# Altium PCB Car2014_finalRev.PcbDoc (part 1 of 2)
Units mm, origin at the board's own origin, x right, y up, seen from the top; angles counter-clockwise.
Board outline 109.6 x 77.2 mm, 4 copper layers (Top Layer, Mid-Layer 1, Mid-Layer 2, Bottom Layer); 157 components, 134 nets, 684 pads, 193 vias.
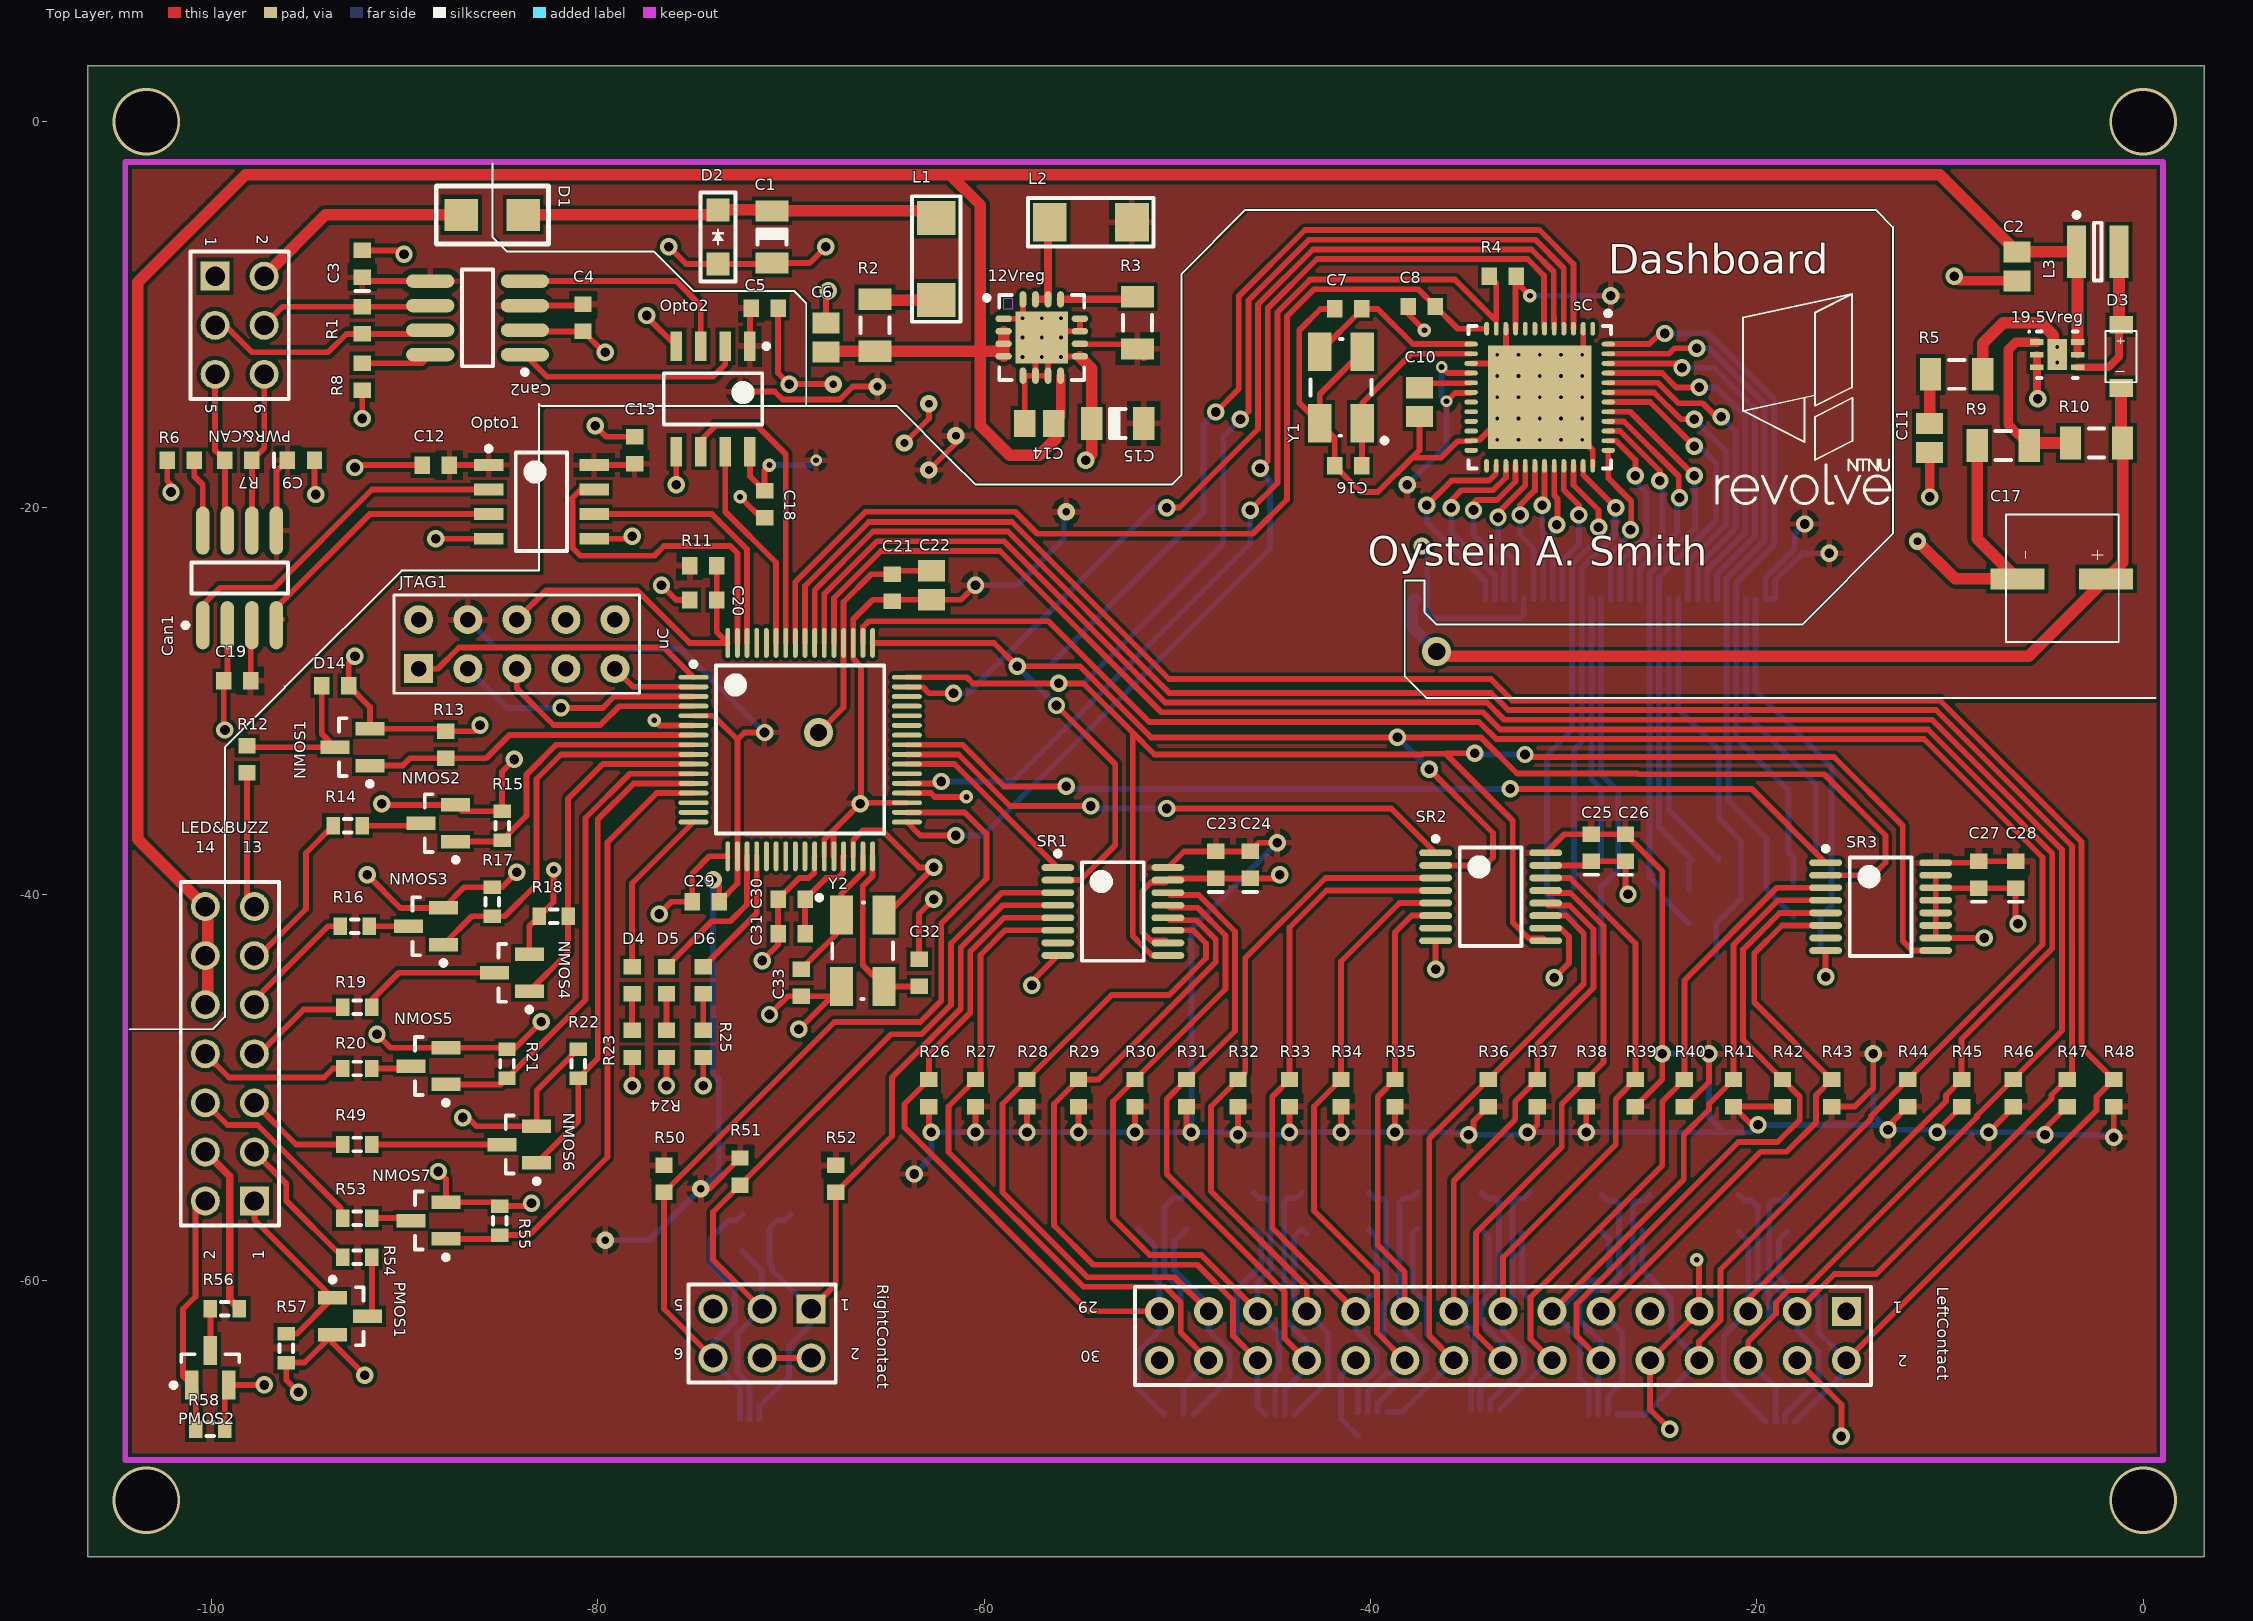
[diagram p0: Top Layer view]
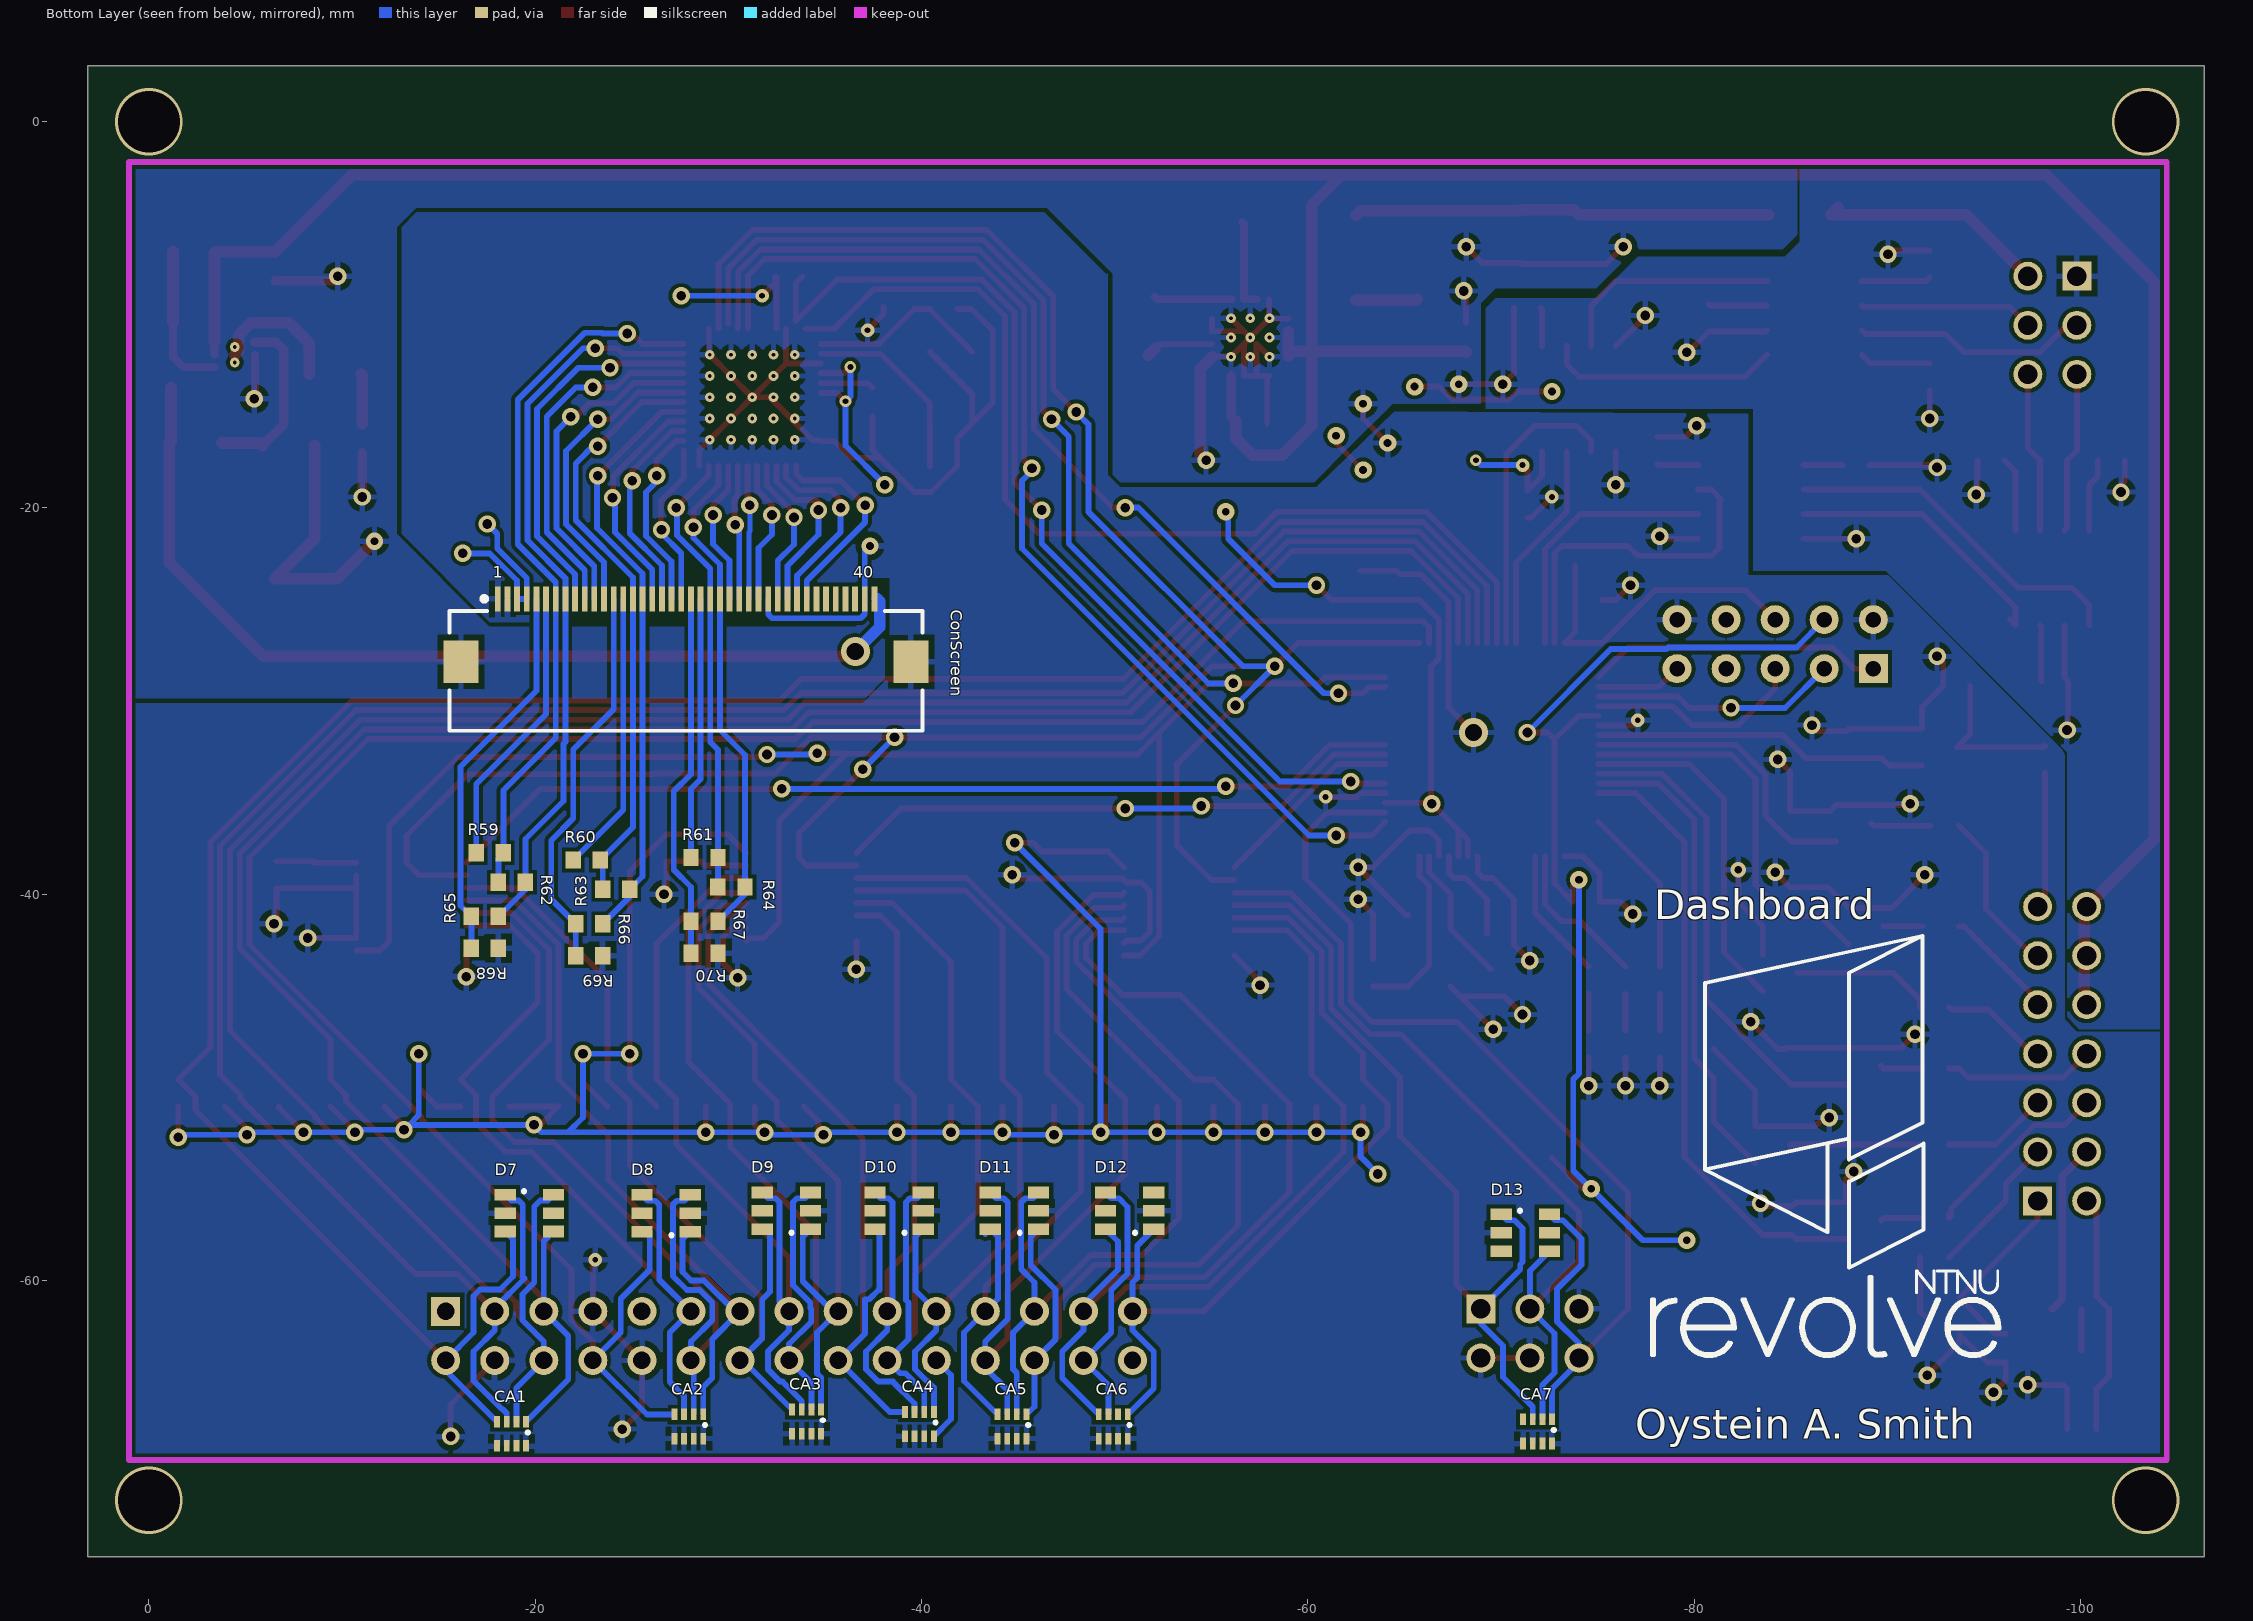
[diagram p1: Bottom Layer view, seen from below]
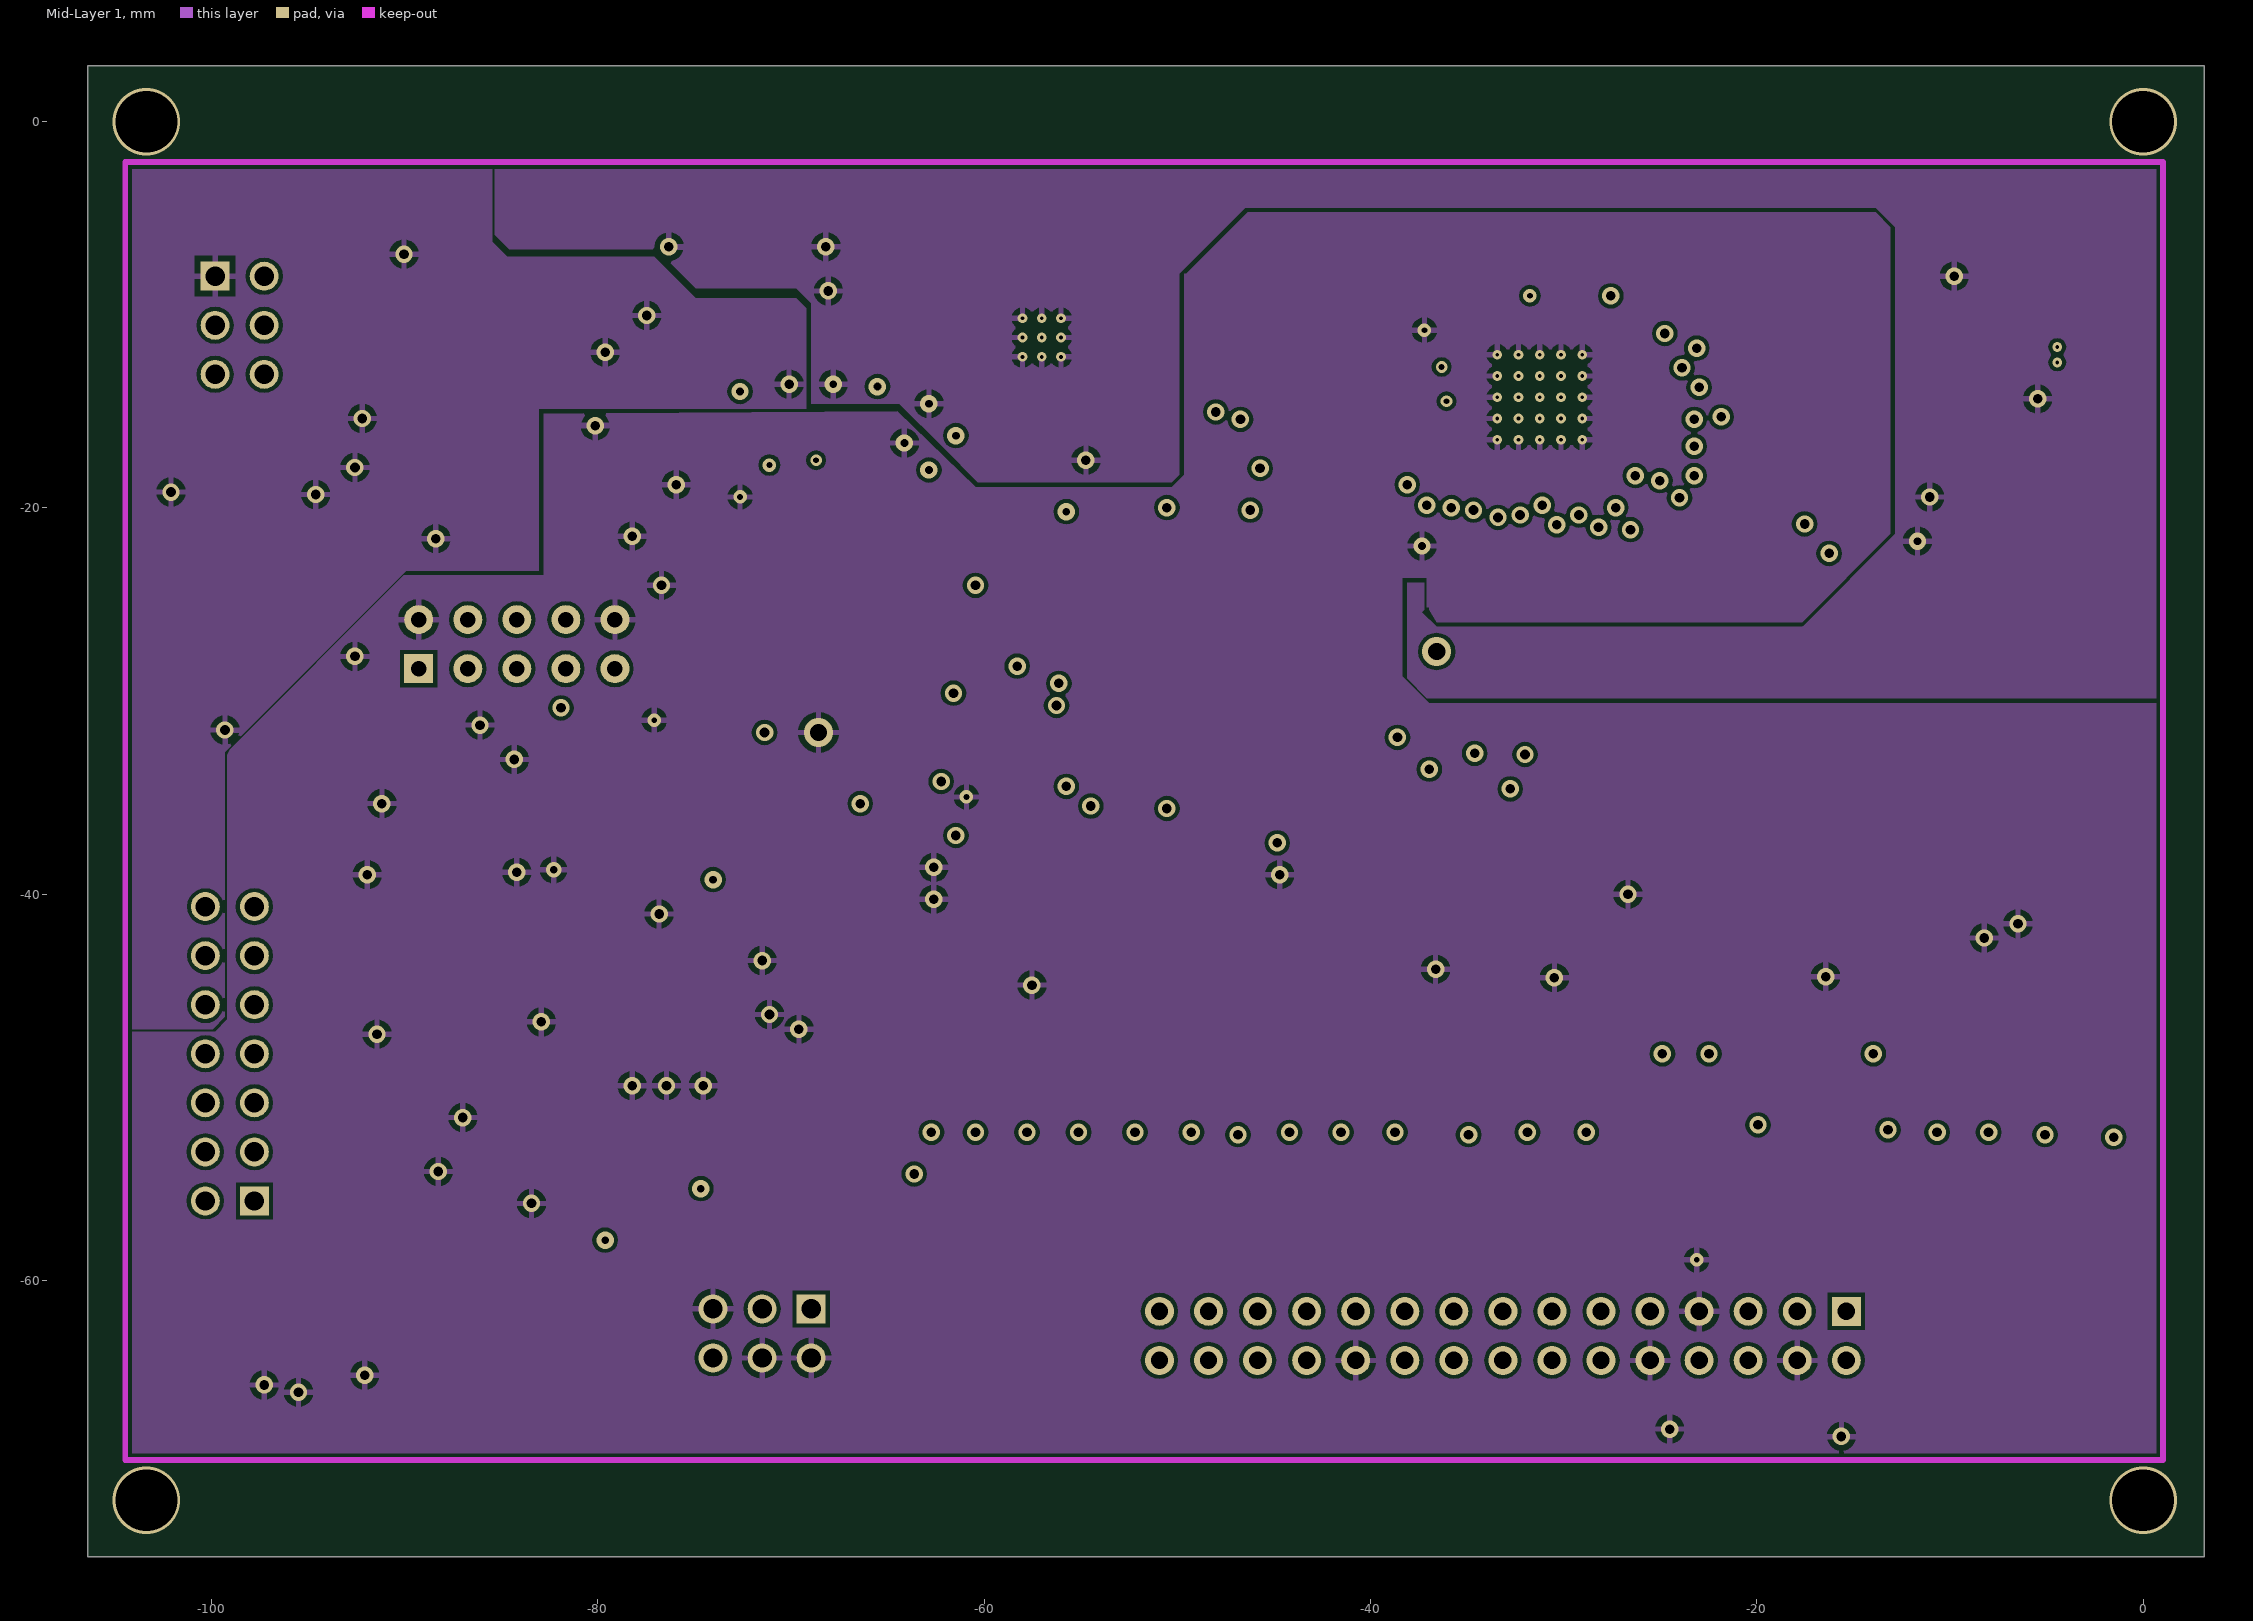
[diagram p2: Mid-Layer 1]
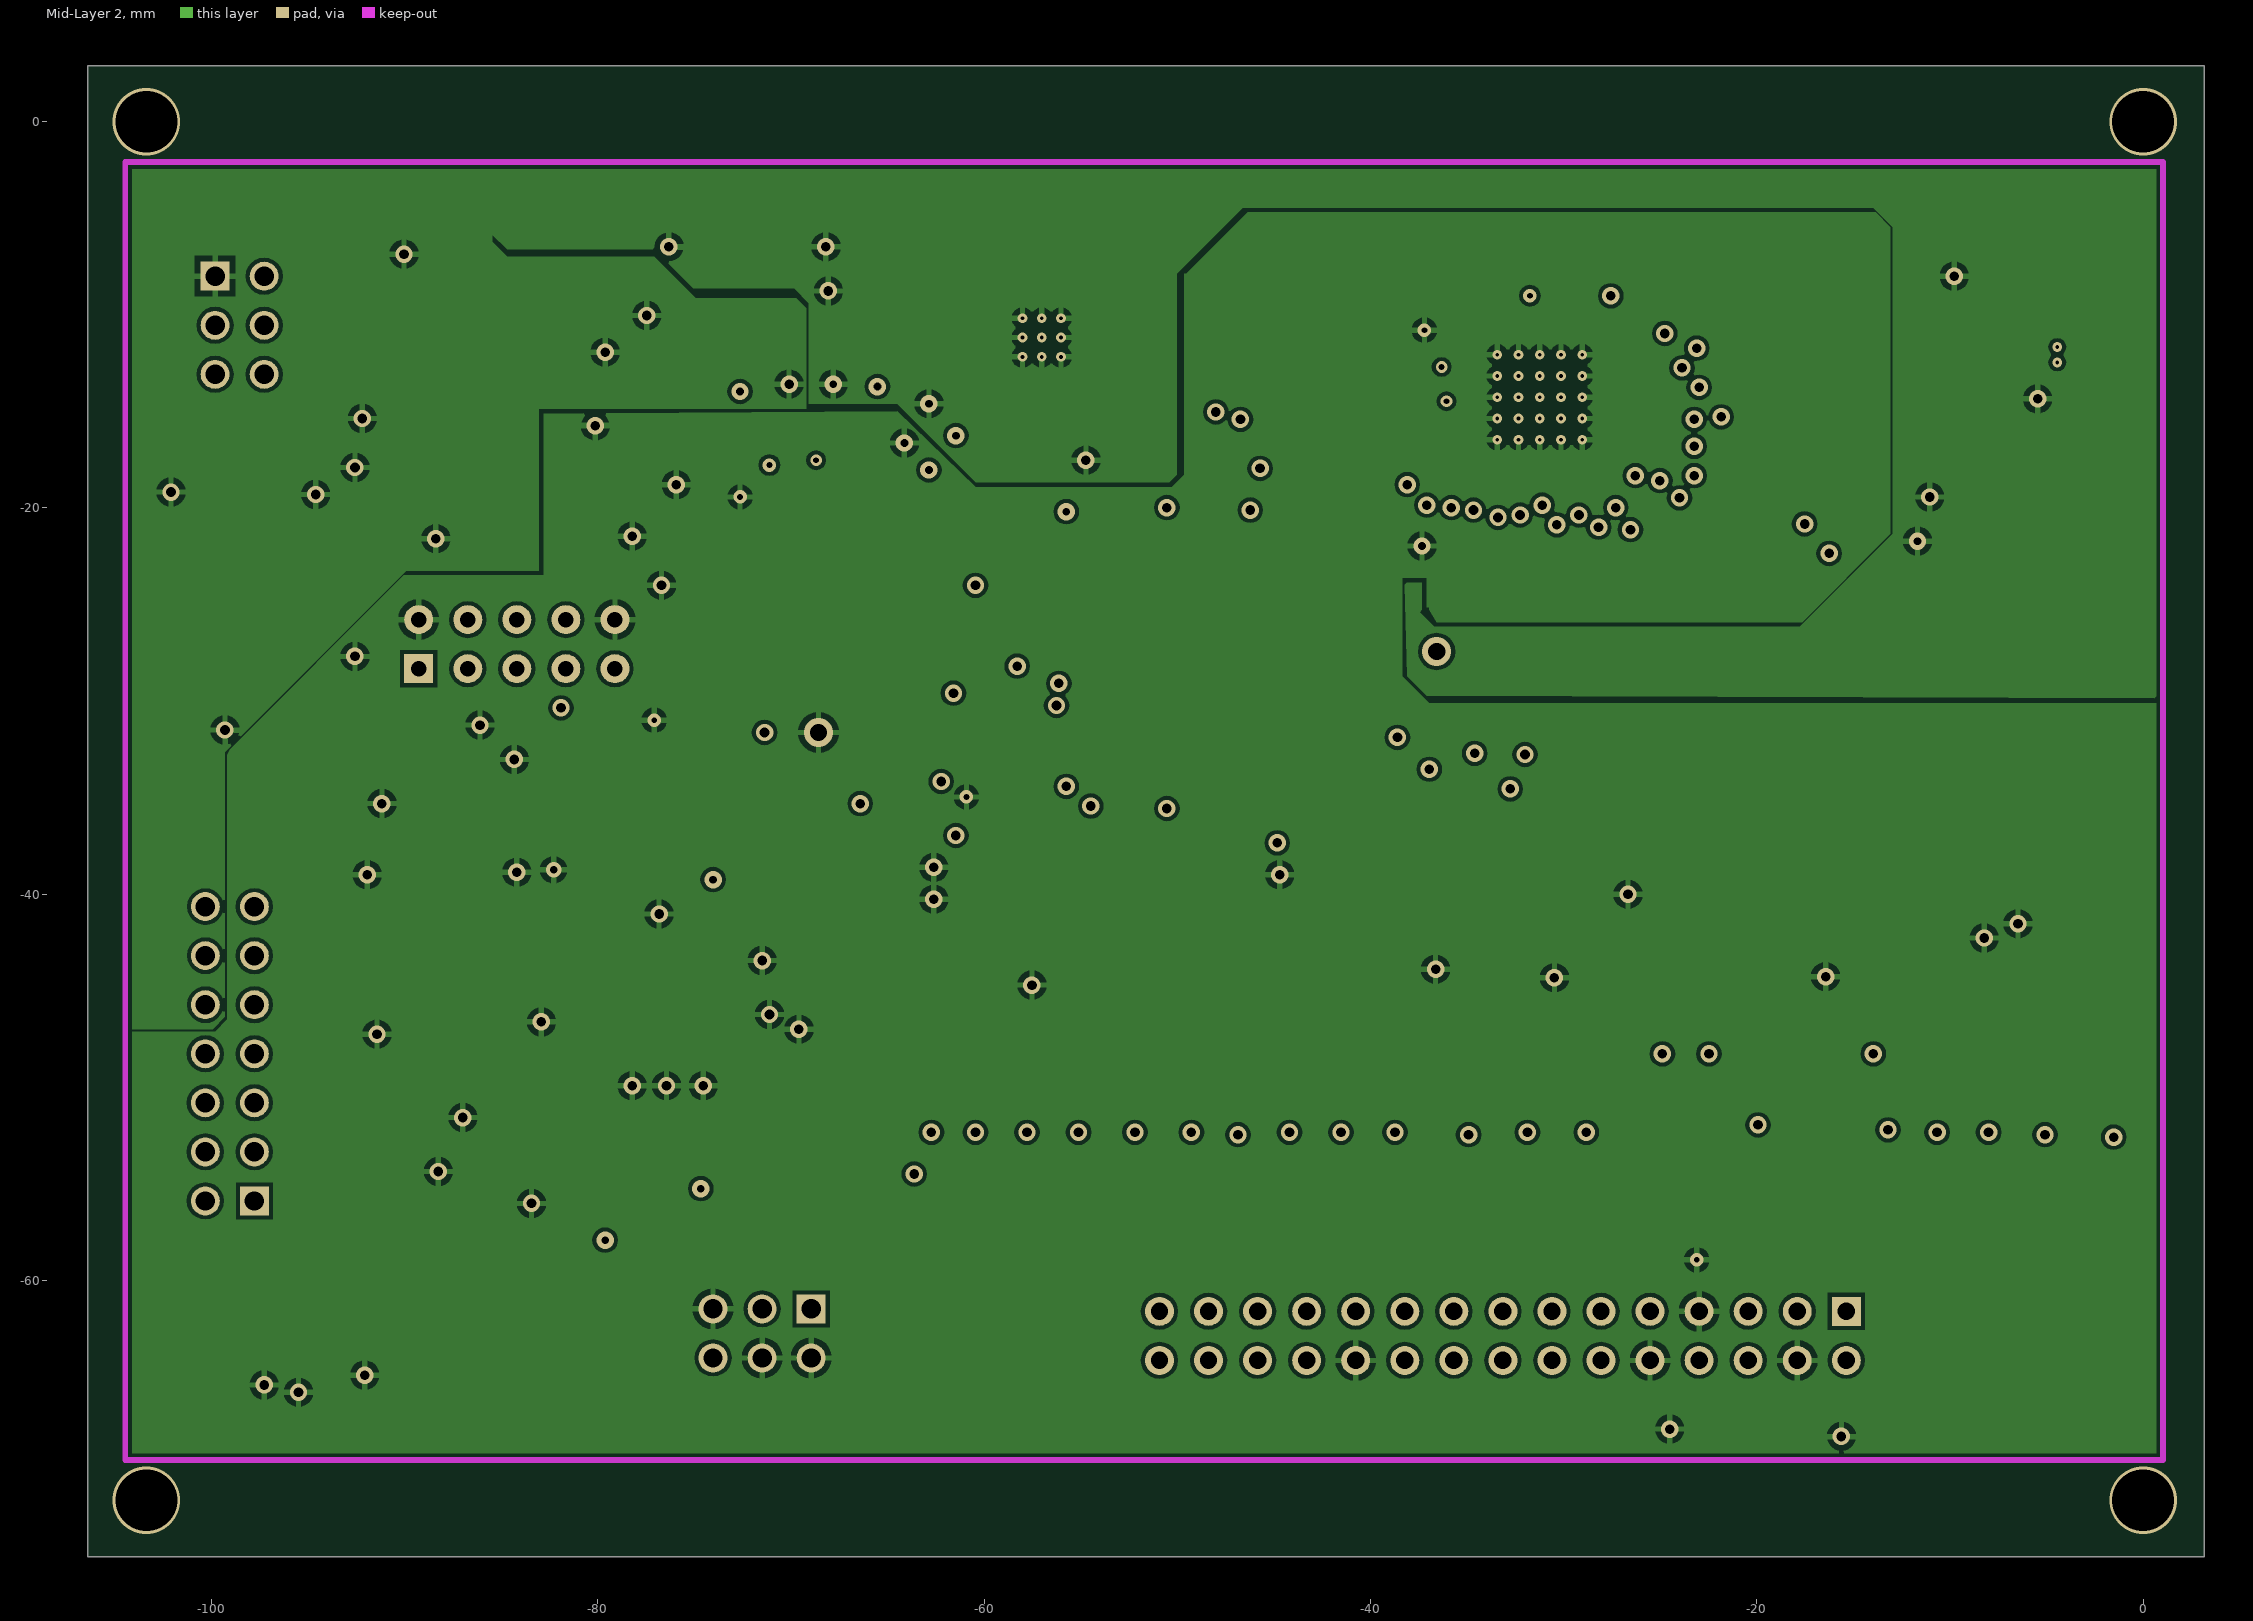
[diagram p3: Mid-Layer 2]

## Layer stack, top to bottom
Top Layer: signal copper 0.0356
Dielectric: core 0.32, FR-4, Dk 4.8
Mid-Layer 1: signal copper 0.0356
Dielectric: prepreg 0.32, FR-4, Dk 4.8
Mid-Layer 2: signal copper 0.0356
Dielectric: core 0.32, FR-4, Dk 4.8
Bottom Layer: signal copper 0.0356

## Board outline
-106.426,-74.295 3.175,-74.295 3.175,2.905 -106.426,2.905

## Design rules (kind name [scope] priority, off if disabled: settings)
AssemblyTestPointUsage SilkToBoardRegionClearance [All] p2:
Clearance [All] p1: gap=0.2
ComponentClearance [All] p1: gap=0.3 collisioncheckmode=3 verticalgap=0.3 showdistances=FALSE
HoleSize [All] p1: absolutevalues=TRUE maxlimit=3 minlimit=0.2 maxpercent=80.000 minpercent=20.000
MinimumAnnularRing [All] p1: minimumring=0.15
MinimumSolderMaskSliver [All] p1: minsoldermaskwidth=0.25
PlaneClearance [All] p1: clearance=0.5
PlaneConnect [All] p1: planeconnectstyle=Relief reliefexpansion=0.5 reliefentries=4 reliefconductorwidth=0.3 reliefairgap=0.3
PolygonConnect [All] p1: connectstyle=Relief reliefconductorwidth=0.3 reliefentries=4 polygonreliefangle="90 Angle" airgapwidth=0.3
RoutingVias [All] p1: holewidth=0.3 width=0.7 viastyle="Through Hole" minholewidth=0.2 minwidth=0.6 maxholewidth=0.9 maxwidth=1.5
SilkToSilkClearance [All] p1: silktosilkclearance=0.25
SilkToSolderMaskClearance [IsPad] p1: minsilkscreentomaskgap=0.25 clearancetoexposedcopper=TRUE
SolderMaskExpansion [All] p1: expansion=0.102
Width [All] p1: maxlimit=10 minlimit=0.15 preferedwidth=0.3
21 further rules are at their usual default settings.

## Classes and differential pairs
component class "Car2014_finalRev_sch2 (2)": C7 C23 C24 C25 C26 C27 C28 CA1 CA2 CA3 CA4 CA5 CA6 CA7 ConScreen D7 D8 D9 D10 D11 D12 D13 D14 JTAG1 LED&BUZZ NMOS1 NMOS2 NMOS3 NMOS4 NMOS5 NMOS6 NMOS7 PMOS1 PMOS2 R4 R12 R13 R14 R15 R16 R17 R18 R19 R20 R26 R27 R28 R29 R30 R31 R32 R33 R34 R36 R37 R38 R39 R40 R41 R42 R43 R44 R45 R46 R47 R48 R49 R50 R51 R52 R53 R54 R55 R56 R57 R58 R59 R60 R61 R62 R63 R64 R65 R66 R67 R68 R69 R70 RightContact sC SR1 SR2 SR3
component class Car2014_finalRev_sch1: 12Vreg 19.5Vreg C1 C2 C3 C9 C11 C12 C13 C14 C15 C17 C18 C19 C20 C21 C22 C29 C30 C31 C32 C33 Can1 Can2 D1 D2 D3 D4 D5 D6 L1 L2 L3 Opto1 Opto2 PWR&CAN R23 R24 R25 uC Y2

## Components (designator, comment, footprint, x,y, rotation, side; value= is the part's Value field where it differs from the comment)
12Vreg "TPS62111RSATG4" RSA16-2700X2700TP -57.023,-11.176 r0 top
19.5Vreg "TPS61170-Q1" DRV6-1600X1000TP -4.445,-12.065 r0 top
C1 "Cap" CAPC3216L -70.993,-5.969 r270 top (schematic designator C26)
C2 "Cap_Murata4,7uF" c0805 -6.539,-7.493 r90 top (schematic designator C36)
C3 "Cap" CAPC1608L -92.202,-7.366 r90 top (schematic designator C28)
C4 "Cap" 1608[0603] -80.772,-10.16 r270 top (schematic designator C3)
C5 "Cap" 1608[0603] -71.374,-9.652 r180 top (schematic designator C22)
C6 "Cap" c0805 -68.199,-11.176 r270 top (schematic designator C15)
C7 "Cap" 1608[0603] -41.148,-9.695 r0 top (schematic designator C4)
C8 "Cap" 1608[0603] -37.338,-9.568 r0 top (schematic designator C6)
C9 "Cap" CAPC1608L -95.377,-17.526 r0 top (schematic designator C29)
C10 "Cap" c0805 -37.465,-14.521 r90 top (schematic designator C7)
C11 "Cap" c0805 -11.049,-16.383 r90 top (schematic designator C37)
C12 "Cap" 1608[0603] -88.392,-17.78 r0 top (schematic designator C23)
C13 "Cap" 1608[0603] -78.105,-17.018 r270 top (schematic designator C25)
C14 "Cap" c0805 -57.15,-15.621 r0 top (schematic designator C1)
C15 "Cap" CAPC3216L -53.086,-15.621 r0 top (schematic designator C16)
C16 "Cap" 1608[0603] -41.148,-17.823 r0 top (schematic designator C5)
C17 "Cap Pol" CAP_electrolyte -2.413,-23.622 r90 top (schematic designator C38)
C18 "Cap" 1608[0603] -71.374,-19.812 r90 top (schematic designator C24)
C19 "Cap" 1608[0603] -98.679,-28.956 r0 top (schematic designator C17)
C20 "Cap" 1608[0603] -74.549,-24.765 r0 top (schematic designator C27)
C21 "Cap" 1608[0603] -64.77,-24.13 r270 top (schematic designator C10)
C22 "Cap" c0805 -62.738,-24.003 r270 top (schematic designator C12)
C23 "Cap" CAPC1608L -48.006,-38.481 r90 top (schematic designator C31)
C24 "Cap" CAPC1608L -46.228,-38.481 r90 top (schematic designator C30)
C25 "Cap" CAPC1608L -28.575,-37.592 r90 top (schematic designator C32)
C26 "Cap" CAPC1608L -26.797,-37.592 r90 top (schematic designator C33)
C27 "Cap" CAPC1608L -8.509,-38.989 r90 top (schematic designator C34)
C28 "Cap" CAPC1608L -6.604,-38.989 r90 top (schematic designator C35)
C29 "Cap" 1608[0603] -74.422,-40.386 r180 top (schematic designator C14)
C30 "Cap" 1608[0603] -69.977,-40.259 r180 top (schematic designator C11)
C31 "Cap" 1608[0603] -69.977,-42.037 r180 top (schematic designator C13)
C32 "Cap" 1608[0603] -63.373,-44.069 r270 top (schematic designator C8)
C33 "Cap" 1608[0603] -69.469,-44.577 r90 top (schematic designator C9)
CA1 "Cap_array" Cap_array_0805 -18.254,-67.564 r0 bottom (schematic designator CA7)
CA2 "Cap_array" Cap_array_0805 -27.432,-67.183 r0 bottom (schematic designator CA1)
CA3 "Cap_array" Cap_array_0805 -33.528,-66.929 r0 bottom (schematic designator CA2)
CA4 "Cap_array" Cap_array_0805 -39.37,-67.056 r0 bottom (schematic designator CA3)
CA5 "Cap_array" Cap_array_0805 -44.162,-67.183 r0 bottom (schematic designator CA4)
CA6 "Cap_array" Cap_array_0805 -49.403,-67.183 r0 bottom (schematic designator CA5)
CA7 "Cap_array" Cap_array_0805 -71.374,-67.437 r0 bottom (schematic designator CA6)
Can1 "SN65HVD234D" D8_M -98.552,-23.622 r90 top
Can2 "SN65HVD234D" D8_M -86.233,-10.16 r180 top
ConScreen "CL586-0557-8" FH12A-40S-0.5SH -27.813,-26.332 r180 bottom
D1 "STTH2R02" STTH2R02A -85.471,-4.826 r0 top (schematic designator D7)
D2 "TVS-diode_14V" TVS-DIODE_14V -73.787,-5.969 r90 top (schematic designator D20)
D3 "Schotky_MBR0530" SOD-123 -1.143,-10.541 r270 top (schematic designator D16)
D4 "LED" 1608[0603] -78.232,-44.45 r270 top (schematic designator D1)
D5 "LED" 1608[0603] -76.454,-44.45 r270 top (schematic designator D2)
D6 "LED" 1608[0603] -74.549,-44.45 r270 top (schematic designator D3)
D7 "TVS_array" TVS_array_SOT23 -17.653,-57.912 r270 bottom (schematic designator D12)
D8 "TVS_array" TVS_array_SOT23 -28.829,-55.118 r90 bottom
D9 "TVS_array" TVS_array_SOT23 -35.052,-54.991 r90 bottom
D10 "TVS_array" TVS_array_SOT23 -40.894,-54.991 r90 bottom
D11 "TVS_array" TVS_array_SOT23 -46.863,-54.991 r90 bottom
D12 "TVS_array" TVS_array_SOT23 -52.832,-54.991 r90 bottom (schematic designator D13)
D13 "TVS_array" TVS_array_SOT23 -69.215,-58.928 r270 bottom (schematic designator D14)
D14 "Schottky diode" 1608[0603] -93.599,-29.21 r0 top (schematic designator D15)
Dashboard "Dashboard" "REVOLVE LOGO SMALL" -17.393,-16.891 r0 top
Dashboard "Dashboard" "Revolve logo" -86.487,-58.039 r180 bottom
JTAG1 "Header 10-pin JTAG" "10pin Header" -89.281,-28.321 r90 top
L1 "Inductor - SPM6530-2R2M" Drossel -62.484,-7.112 r270 top (schematic designator L2)
L2 "Inductor - SPM6530-2R2M" Drossel -54.483,-5.207 r0 top (schematic designator L1)
L3 "SRN3015-220M" BOUR-SRN3015-2_V -2.348,-6.731 r0 top
LED&BUZZ "Molex WM8251" HDR2X7 -97.79,-55.88 r90 top
LeftContact "Header 15X2" HDR2X15 -15.367,-61.595 r180 top (schematic designator ConLft)
NMOS1 "SSM3K329RLFCT" SOT23 -92.71,-32.385 r180 top (schematic designator NMOS2)
NMOS2 "SSM3K329RLFCT" SOT23 -88.265,-36.322 r180 top (schematic designator NMOS8)
NMOS3 "SSM3K329RLFCT" SOT23 -88.9,-41.656 r180 top (schematic designator NMOS5)
NMOS4 "SSM3K329RLFCT" SOT23 -84.455,-44.069 r180 top (schematic designator NMOS7)
NMOS5 "SSM3K329RLFCT" SOT23 -88.773,-48.895 r180 top (schematic designator NMOS4)
NMOS6 "SSM3K329RLFCT" SOT23 -84.074,-52.959 r180 top
NMOS7 "SSM3K329RLFCT" SOT23 -88.773,-56.896 r180 top (schematic designator NMOS3)
Opto1 "CAN OptoCoupler" "SOIC 8pin,  optocoupler" -82.931,-19.685 r0 top
Opto2 "CAN OptoCoupler" "SOIC 8pin,  optocoupler" -74.041,-14.351 r270 top
PMOS1 "ZXMP2120" SOT23 -92.837,-61.849 r0 top
PMOS2 "ZXMP2120" SOT23 -100.076,-64.516 r90 top
PWR&CAN "2x3 pin molex" "2x3 pin molex" -99.822,-8.001 r270 top
R1 "Resistor" 1608[0603] -92.202,-10.287 r270 top (schematic designator R29)
R2 "Resistor" RESC3216L -65.659,-10.541 r90 top (schematic designator R42)
R3 "Resistor" RESC3216L -52.07,-10.414 r270 top (schematic designator R25)
R4 "Resistor" 1608[0603] -33.147,-8.001 r0 top (schematic designator R72)
R5 "Resistor" RESC3216L -9.652,-13.081 r180 top (schematic designator R78)
R6 "Resistor" 1608[0603] -101.6,-17.526 r180 top (schematic designator R27)
R7 "Resistor" 1608[0603] -98.614,-17.526 r180 top (schematic designator R28)
R8 "Resistor" 1608[0603] -92.202,-13.208 r270 top (schematic designator R26)
R9 "Resistor" RESC3216L -7.239,-16.764 r0 top (schematic designator R80)
R10 "Resistor" RESC3216L -2.413,-16.637 r0 top (schematic designator R79)
R11 "Resistor" 1608[0603] -74.549,-22.987 r0 top (schematic designator R73)
R12 "Resistor" 1608[0603] -98.171,-33.02 r90 top (schematic designator R39)
R13 "Resistor" 1608[0603] -87.884,-32.258 r90 top (schematic designator R38)
R14 "Resistor" RESC1608L -92.964,-36.449 r180 top (schematic designator R48)
R15 "Resistor" RESC1608L -84.963,-36.449 r90 top (schematic designator R55)
R16 "Resistor" RESC1608L -92.583,-41.656 r180 top (schematic designator R46)
R17 "Resistor" RESC1608L -85.471,-40.386 r90 top (schematic designator R51)
R18 "Resistor" RESC1608L -82.296,-41.148 r180 top (schematic designator R52)
R19 "Resistor" RESC1608L -92.456,-45.847 r180 top (schematic designator R47)
R20 "Resistor" RESC1608L -92.456,-49.022 r180 top (schematic designator R45)
R21 "Resistor" RESC1608L -84.709,-48.768 r90 top (schematic designator R53)
R22 "Resistor" RESC1608L -81.026,-48.768 r90 top (schematic designator R54)
R23 "Resistor" 1608[0603] -78.232,-47.752 r90 top (schematic designator R21)
R24 "Resistor" 1608[0603] -76.454,-47.752 r90 top (schematic designator R22)
R25 "Resistor" 1608[0603] -74.549,-47.752 r90 top (schematic designator R23)
R26 "Resistor" 1608[0603] -62.865,-50.292 r270 top (schematic designator R9)
R27 "Resistor" 1608[0603] -60.452,-50.292 r270 top (schematic designator R18)
R28 "Resistor" 1608[0603] -57.785,-50.292 r270 top (schematic designator R5)
R29 "Resistor" 1608[0603] -55.118,-50.292 r270 top (schematic designator R17)
R30 "Resistor" 1608[0603] -52.197,-50.292 r270 top (schematic designator R8)
R31 "Resistor" 1608[0603] -49.53,-50.292 r270 top (schematic designator R14)
R32 "Resistor" 1608[0603] -46.863,-50.292 r270 top (schematic designator R15)
R33 "Resistor" 1608[0603] -44.196,-50.292 r270 top (schematic designator R12)
R34 "Resistor" 1608[0603] -41.529,-50.292 r270 top (schematic designator R11)
R35 "Resistor" 1608[0603] -38.735,-50.292 r270 top (schematic designator R1)
R36 "Resistor" 1608[0603] -33.909,-50.292 r270 top (schematic designator R4)
R37 "Resistor" 1608[0603] -31.369,-50.292 r270 top (schematic designator R10)
R38 "Resistor" 1608[0603] -28.829,-50.292 r270 top (schematic designator R13)
R39 "Resistor" 1608[0603] -26.289,-50.292 r270 top (schematic designator R16)
R40 "Resistor" 1608[0603] -23.749,-50.292 r270 top (schematic designator R3)
R41 "Resistor" 1608[0603] -21.209,-50.292 r270 top (schematic designator R2)
R42 "Resistor" 1608[0603] -18.669,-50.292 r270 top (schematic designator R7)
R43 "Resistor" 1608[0603] -16.129,-50.292 r270 top (schematic designator R6)
R44 "Resistor" 1608[0603] -12.192,-50.292 r90 top (schematic designator R60)
R45 "Resistor" 1608[0603] -9.398,-50.292 r90 top (schematic designator R58)
R46 "Resistor" 1608[0603] -6.731,-50.292 r90 top (schematic designator R59)
R47 "Resistor" 1608[0603] -3.937,-50.292 r90 top (schematic designator R56)
R48 "Resistor" 1608[0603] -1.524,-50.292 r90 top (schematic designator R57)
R49 "Resistor" RESC1608L -92.456,-52.959 r180 top
R50 "Resistor" 1608[0603] -76.581,-54.737 r270 top (schematic designator R61)
R51 "Resistor" 1608[0603] -72.644,-54.356 r90 top (schematic designator R20)
R52 "Resistor" 1608[0603] -67.691,-54.737 r90 top (schematic designator R19)
R53 "Resistor" RESC1608L -92.456,-56.769 r0 top (schematic designator R44)
R54 "Resistor" RESC1608L -92.456,-58.801 r180 top (schematic designator R83)
R55 "Resistor" RESC1608L -85.09,-56.896 r270 top (schematic designator R50)
R56 "Resistor" RESC1608L -99.314,-61.468 r180 top (schematic designator R81)
R57 "Resistor" RESC1608L -96.139,-63.5 r270 top (schematic designator R84)
R58 "Resistor" RESC1608L -100.076,-67.691 r180 top (schematic designator R85)
R59 "Resistor" 1608[0603] -17.653,-37.846 r180 bottom (schematic designator R66)
R60 "Resistor" 1608[0603] -22.671,-38.227 r180 bottom (schematic designator R67)
R61 "Resistor" 1608[0603] -28.767,-38.1 r0 bottom (schematic designator R70)
R62 "Resistor" 1608[0603] -18.796,-39.37 r180 bottom
R63 "Resistor" 1608[0603] -24.195,-39.751 r0 bottom (schematic designator R64)
R64 "Resistor" 1608[0603] -30.164,-39.624 r0 bottom (schematic designator R68)
R65 "Resistor" 1608[0603] -17.399,-41.148 r0 bottom
R66 "Resistor" 1608[0603] -22.798,-41.529 r180 bottom (schematic designator R75)
R67 "Resistor" 1608[0603] -28.767,-41.402 r0 bottom (schematic designator R71)
R68 "Resistor" 1608[0603] -17.399,-42.799 r0 bottom (schematic designator R63)
R69 "Resistor" 1608[0603] -22.798,-43.18 r180 bottom (schematic designator R74)
R70 "Resistor" 1608[0603] -28.767,-43.053 r180 bottom (schematic designator R69)
RightContact "2x3 pin molex" "2x3 pin molex" -68.961,-61.468 r180 top (schematic designator ConRgt)
sC "FT800Q-R" VQFN-48_N -31.242,-14.267 r270 top
SR1 "SN74HC165PWR" TSOP65P640X120-16N -53.34,-40.894 r0 top (schematic designator SR2)
SR2 "SN74HC165PWR" TSOP65P640X120-16N -33.782,-40.132 r0 top (schematic designator SR3)
SR3 "SN74HC165PWR" TSOP65P640X120-16N -13.589,-40.64 r0 top (schematic designator SR1)
uC "AT32UC3C2512C-A2UT" TQFP64_L -69.531,-32.512 r0 top
Y1 "Crystal" SMD-CRYSTAL -41.529,-13.759 r90 top (schematic designator Y2)
Y2 "Crystal" SMD-CRYSTAL -66.294,-42.926 r270 top (schematic designator Y1)

## Footprints (in the part's own frame and the unit in brackets; to place one, negate y for a bottom-side part, rotate by r counter-clockwise, add the part's x,y. Pads: shape width x height; smd on the part's side, far side on the other; paste and mask are expansions set on the pad)
"2x3 pin molex" [mm]
  rect 1.5x1.5 hole 1: 1(0,0)
  round 1.5 hole 1: 2(0,2.54) 3(2.54,0) 4(2.54,2.54) 5(5.08,0) 6(5.08,2.54)
  silkscreen extent -1.27,-1.27 6.35,3.81, body extent -2.44,-3.6 7.52,6.15, height 2.38
"10pin Header" [mm]
  rect 1.5x1.5 hole 0.8: 1(0,0)
  round 1.5 hole 0.8: 2(0,-2.54) 3(0,-5.08) 4(0,-7.62) 5(0,-10.16) 6(2.54,-10.16) 7(2.54,-7.62) 8(2.54,-5.08) 9(2.54,-2.54) 10(2.54,0)
  silkscreen extent -1.27,-11.43 3.81,1.27, body extent -1.27,-11.43 3.81,1.27, height 10.02
1608[0603] [mm] "Chip Capacitor, Body 1.6x0.8mm, IPC High Density"
  rect 0.8x0.9 smd: 1(-0.7,0) 2(0.7,0)
  body extent -0.87,-0.48 0.87,0.48, height 0.5
BOUR-SRN3015-2_V [mm] "SMD, 2-Leads, Body 3x3mm, Height 1.5mm"
  rect 1x2.7 smd: 1(-1.1,0) 2(1.1,0)
  silkscreen extent -1.22,-1.5 0.2,2.02, body extent -1.5,-1.5 1.5,1.5, height 1.5
c0805 [mm] "Chip Capacitor, Body 2.0x1.3mm, IPC High Density"
  rect 1.1x1.4 smd: 1(-0.75,0) 2(0.75,0)
  body extent -1.1,-0.72 1.1,0.72, height 1.4
Cap_array_0805 [mm]
  rect 0.3x0.6 smd: 1(-1.275,-0.25) 2(-0.775,-0.25) 3(-0.275,-0.25) 4(0.225,-0.25) 5(0.225,1) 6(-0.275,1) 7(-0.775,1) 8(-1.275,1)
  silkscreen extent -1.37,0.3 -1.35,0.3
CAP_electrolyte [mm]
  rect 1.1x2.8 smd: 1(-0.05,-0.5) 2(-0.05,4.1)
  silkscreen extent -3.32,-1.15 3.28,4.67
CAPC1608L [mm] "Chip Capacitor, Body 1.6x0.8mm, IPC High Density"
  rect 0.8x0.9 smd: 1(-0.7,0) 2(0.7,0)
  silkscreen extent -1.4,-0.35 -1.4,0.35, body extent -0.87,-0.48 0.87,0.48, height 0.85
CAPC3216L [mm] "Chip Capacitor, Body 3.2x1.6mm, IPC High Density"
  rect 1.1x1.7 smd: 1(-1.35,0) 2(1.35,0)
  silkscreen extent -0.4,-0.75 0.4,0.75, body extent -1.7,-0.9 1.7,0.9, height 1.35
D8_M [mm] "SOIC, 8-Leads, Body 4.9x3.9mm, Pitch 1.27mm, IPC Low Density"
  oval 2.5x0.7 smd: 1(-2.45,1.905) 2(-2.45,0.635) 3(-2.45,-0.635) 4(-2.45,-1.905) 5(2.45,-1.905) 6(2.45,-0.635) 7(2.45,0.635) 8(2.45,1.905)
  silkscreen extent -2.57,-2.5 0.8,2.93, body extent -2,-2.5 2,2.5, height 1.75
Drossel [mm]
  rect 1.75x2 smd: 1(-2.125,0) 2(2.125,0)
  silkscreen extent -3.25,-1.25 3.25,1.25
DRV6-1600X1000TP [mm] "SON, 6-Leads, Body 2x2mm, Pitch 0.65mm, Thermal Pad 1.6x1mm, TI Recommended"
  rect 0.7x0.3 smd paste-0.025 mask+0.07: 1(-1.05,0.65) 2(-1.05,0) 3(-1.05,-0.65) 4(1.05,-0.65) 5(1.05,0) 6(1.05,0.65)
  rect 1x1.6 smd paste-0.5 mask+0.07: 7(0,0)
  silkscreen extent -1.5,-1.2 1.05,1.25, body extent -1.05,-1.05 1.05,1.05, height 0.8
FH12A-40S-0.5SH [mm] "Connector; FH12 Series; 40 Position; 0.5mm Spaced Top Contact"
  rect 0.3x1.3 smd: 1(-9.75,1.625) 2(-9.25,1.625) 3(-8.75,1.625) 4(-8.25,1.625) 5(-7.75,1.625) 6(-7.25,1.625) 7(-6.75,1.625) 8(-6.25,1.625) 9(-5.75,1.625) 10(-5.25,1.625) 11(-4.75,1.625) 12(-4.25,1.625) 13(-3.75,1.625) 14(-3.25,1.625) 15(-2.75,1.625) 16(-2.25,1.625) 17(-1.75,1.625) 18(-1.25,1.625) 19(-0.75,1.625) 20(-0.25,1.625) 21(0.25,1.625) 22(0.75,1.625) 23(1.25,1.625) 24(1.75,1.625) 25(2.25,1.625) 26(2.75,1.625) 27(3.25,1.625) 28(3.75,1.625) 29(4.25,1.625) 30(4.75,1.625) 31(5.25,1.625) 32(5.75,1.625) 33(6.25,1.625) 34(6.75,1.625) 35(7.25,1.625) 36(7.75,1.625) 37(8.25,1.625) 38(8.75,1.625) 39(9.25,1.625) 40(9.75,1.625)
  rect 1.8x2.2 smd: 41(-11.65,-1.625) 42(11.65,-1.625)
  silkscreen extent -12.25,-5.2 12.25,1.75
HDR2X7 [mm] "Connector; Header; 7x2 Position"
  rect 1.5x1.5 hole 1: 1(0,0)
  round 1.5 hole 1: 2(0,2.54) 3(2.54,0) 4(2.54,2.54) 5(5.08,0) 6(5.08,2.54) 7(7.62,0) 8(7.62,2.54) 9(10.16,0) 10(10.16,2.54) 11(12.7,0) 12(12.7,2.54) 13(15.24,0) 14(15.24,2.54)
  silkscreen extent -1.27,-1.27 16.51,3.81
HDR2X15 [mm] "Connector; Header; 15x2 Position"
  rect 1.5x1.5 hole 0.9: 1(0,0)
  round 1.5 hole 0.9: 2(0,2.54) 3(2.54,0) 4(2.54,2.54) 5(5.08,0) 6(5.08,2.54) 7(7.62,0) 8(7.62,2.54) 9(10.16,0) 10(10.16,2.54) 11(12.7,0) 12(12.7,2.54) 13(15.24,0) 14(15.24,2.54) 15(17.78,0) 16(17.78,2.54) 17(20.32,0) 18(20.32,2.54) 19(22.86,0) 20(22.86,2.54) 21(25.4,0) 22(25.4,2.54) 23(27.94,0) 24(27.94,2.54) 25(30.48,0) 26(30.48,2.54) 27(33.02,0) 28(33.02,2.54) 29(35.56,0) 30(35.56,2.54)
  silkscreen extent -1.27,-1.27 36.83,3.81, body extent -2.31,-3.56 38.13,6.19, height 11.45
RESC1608L [mm] "Chip Resistor, Body 1.6x0.8mm, IPC High Density"
  rect 0.7x0.9 smd: 1(-0.75,0) 2(0.75,0)
  silkscreen extent -0.2,-0.35 0.2,0.35, body extent -0.85,-0.48 0.85,0.48, height 0.6
RESC3216L [mm] "Chip Resistor, Body 3.2x1.6mm, IPC High Density"
  rect 1.1x1.7 smd: 1(-1.35,0) 2(1.35,0)
  silkscreen extent -0.4,-0.75 0.4,0.75, body extent -1.68,-0.87 1.68,0.87, height 0.71
"Revolve logo" [mm]
  silkscreen extent -8.68,-5.88 9.32,15.89
"REVOLVE LOGO SMALL" [mm]
  silkscreen extent -4.69,-2.91 4.31,7.97
RSA16-2700X2700TP [mm] "QFN, 16-Leads, Body 4x4mm, Pitch 0.65mm, Thermal Pad 2.7x2.7mm, TI Recommended"
  oval 0.85x0.35 smd paste-0.025 mask+0.07: 1(-1.975,0.975) 2(-1.975,0.325) 3(-1.975,-0.325) 4(-1.975,-0.975) 9(1.975,-0.975) 10(1.975,-0.325) 11(1.975,0.325) 12(1.975,0.975)
  oval 0.35x0.85 smd paste-0.025 mask+0.07: 5(-0.975,-1.975) 6(-0.325,-1.975) 7(0.325,-1.975) 8(0.975,-1.975) 13(0.975,1.975) 14(0.325,1.975) 15(-0.325,1.975) 16(-0.975,1.975)
  rect 2.7x2.7 smd paste-1.35 mask+0.07: 17(0,0)
  Top Layer keep-out region: -2,1.5 -1.5,1.5 -1.5,2 -2,2
  silkscreen extent -2.97,-2.2 2.2,2.2, body extent -2.05,-2.05 2.05,2.05, height 1
SMD-CRYSTAL [mm] "Quartz Crystal, SM; Body 5.0x 3.2 mm (LxW)"
  rect 2x1.2 smd: 1(-1.85,-1.1) 2(1.85,-1.1) 3(1.85,1.1) 4(-1.85,1.1)
  silkscreen extent -2.87,-2.38 2.5,1.58, body extent -2.6,-1.7 2.6,1.7, height 1
SOD-123 [mm]
  rect 0.91x1.22 smd: 1(-0.025,0) 2(3.25,0)
  silkscreen extent 0.3,-0.8 2.95,0.8
"SOIC 8pin,  optocoupler" [mm] "8pin SOIC 8pin logic out Fairchild Semi"
  rect 1.52x0.61 smd: 1(-2.73,1.905) 2(-2.73,0.635) 3(-2.73,-0.635) 4(-2.73,-1.905) 5(2.73,-1.905) 6(2.73,-0.635) 7(2.73,0.635) 8(2.73,1.905)
  silkscreen extent -2.85,-2.55 1.33,2.88, body extent -2.1,-2.55 2.1,2.55, height 3.63
SOT23 [mm] "SOT23, 3-Leads, Body 2,92x2,37mm, Pitch 0,95mm, IPC Medium Density"
  rect 1.5x0.7 smd: 1(-0.9,0.95) 2(-0.9,-0.95) 3(0.9,0)
  silkscreen extent -1.03,-1.5 0.7,2.02, body extent -0.7,-1.52 0.7,1.52, height 1.1
STTH2R02A [mm]
  rect 1.73x1.67 smd: 1(-1.605,0) 2(1.605,0)
  silkscreen extent -2.9,-1.5 2.9,1.5, body extent -2.43,-1.63 2.43,1.63, height 2
TQFP64_L [mm] "Thin QFP, 64-Leads, Body 10x10mm, Pitch 0.5mm, IPC High Density"
  oval 1.55x0.25 smd: 1(-5.525,3.75) 2(-5.525,3.25) 3(-5.525,2.75) 4(-5.525,2.25) 5(-5.525,1.75) 6(-5.525,1.25) 7(-5.525,0.75) 8(-5.525,0.25) 9(-5.525,-0.25) 10(-5.525,-0.75) 11(-5.525,-1.25) 12(-5.525,-1.75) 13(-5.525,-2.25) 14(-5.525,-2.75) 15(-5.525,-3.25) 16(-5.525,-3.75) 33(5.525,-3.75) 34(5.525,-3.25) 35(5.525,-2.75) 36(5.525,-2.25) 37(5.525,-1.75) 38(5.525,-1.25) 39(5.525,-0.75) 40(5.525,-0.25) 41(5.525,0.25) 42(5.525,0.75) 43(5.525,1.25) 44(5.525,1.75) 45(5.525,2.25) 46(5.525,2.75) 47(5.525,3.25) 48(5.525,3.75)
  oval 0.25x1.55 smd: 17(-3.75,-5.525) 18(-3.25,-5.525) 19(-2.75,-5.525) 20(-2.25,-5.525) 21(-1.75,-5.525) 22(-1.25,-5.525) 23(-0.75,-5.525) 24(-0.25,-5.525) 25(0.25,-5.525) 26(0.75,-5.525) 27(1.25,-5.525) 28(1.75,-5.525) 29(2.25,-5.525) 30(2.75,-5.525) 31(3.25,-5.525) 32(3.75,-5.525) 49(3.75,5.525) 50(3.25,5.525) 51(2.75,5.525) 52(2.25,5.525) 53(1.75,5.525) 54(1.25,5.525) 55(0.75,5.525) 56(0.25,5.525) 57(-0.25,5.525) 58(-0.75,5.525) 59(-1.25,5.525) 60(-1.75,5.525) 61(-2.25,5.525) 62(-2.75,5.525) 63(-3.25,5.525) 64(-3.75,5.525)
  silkscreen extent -5.65,-4.35 4.35,4.55, body extent -5,-5 5,5, height 1.6
TSOP65P640X120-16N [mm] "TSOP, 16-Leads, Body 5,00x4,40mm, Pitch 0,65mm, IPC Medium Density"
  oval 1.7x0.35 smd: 1(-2.85,2.275) 2(-2.85,1.625) 3(-2.85,0.975) 4(-2.85,0.325) 5(-2.85,-0.325) 6(-2.85,-0.975) 7(-2.85,-1.625) 8(-2.85,-2.275) 9(2.85,-2.275) 10(2.85,-1.625) 11(2.85,-0.975) 12(2.85,-0.325) 13(2.85,0.325) 14(2.85,0.975) 15(2.85,1.625) 16(2.85,2.275)
  silkscreen extent -2.97,-2.55 1.6,3.12, body extent -2.25,-2.55 2.25,2.55, height 1.2
TVS-DIODE_14V [mm]
  rect 1.2x1.2 smd: A(-1.4,0) K(1.4,0)
  silkscreen extent -2.3,-0.9 2.3,0.9
TVS_array_SOT23 [mm]
  rect 0.6x1.1 smd: 1(-2.35,0.8) 2(-1.4,0.8) 3(-0.45,0.8) 4(-0.45,3.3) 5(-1.4,3.3) 6(-2.35,3.3)
  silkscreen extent -2.55,1.78 -2.52,1.78
VQFN-48_N [mm] "QFN, 48-Leads, Body 7.08x7.08mm, Pitch 0.5mm, Thermal Pad 5.36x5.36mm, IPC Medium Density"
  oval 0.7x0.25 smd: 1(-3.55,2.75) 2(-3.55,2.25) 3(-3.55,1.75) 4(-3.55,1.25) 5(-3.55,0.75) 6(-3.55,0.25) 7(-3.55,-0.25) 8(-3.55,-0.75) 9(-3.55,-1.25) 10(-3.55,-1.75) 11(-3.55,-2.25) 12(-3.55,-2.75) 25(3.55,-2.75) 26(3.55,-2.25) 27(3.55,-1.75) 28(3.55,-1.25) 29(3.55,-0.75) 30(3.55,-0.25) 31(3.55,0.25) 32(3.55,0.75) 33(3.55,1.25) 34(3.55,1.75) 35(3.55,2.25) 36(3.55,2.75)
  oval 0.25x0.7 smd: 13(-2.75,-3.55) 14(-2.25,-3.55) 15(-1.75,-3.55) 16(-1.25,-3.55) 17(-0.75,-3.55) 18(-0.25,-3.55) 19(0.25,-3.55) 20(0.75,-3.55) 21(1.25,-3.55) 22(1.75,-3.55) 23(2.25,-3.55) 24(2.75,-3.55) 37(2.75,3.55) 38(2.25,3.55) 39(1.75,3.55) 40(1.25,3.55) 41(0.75,3.55) 42(0.25,3.55) 43(-0.25,3.55) 44(-0.75,3.55) 45(-1.25,3.55) 46(-1.75,3.55) 47(-2.25,3.55) 48(-2.75,3.55)
  rect 5.36x5.36 smd: 49(0,0)
  silkscreen extent -4.46,-3.69 3.69,3.69, body extent -3.54,-3.54 3.54,3.54, height 1

## Part data
12Vreg: library part CMP-0323-00165-1, "Buck Step Down Regulator with 3.1 to 17 V Input and 3.3 V Output, -40 to 85 degC, 16-Pin QFN (RSA), Green (RoHS & no Sb/Br)"
19.5Vreg: library part CMP-0347-00038-1, "Boost Voltage Converter with 3 to 18 V Input and 3 to 38 V Output, -40 to 85 degC, 6-Pin SON (DRV), Green (RoHS & no Sb/Br)"
C1 C3 C4 C5 C6 C7 C8 C9 C10 C11 C12 C13 C14 C15 C16 C18 C19 C20 C21 C22 C23 C24 C25 C26 C27 C28 C29 C30 C31 C32 C33: "Capacitor"
C2: library part Cap, "Capacitor"
C17: "Polarized Capacitor (Radial)"
Can1 Can2: library part CMP-0315-00083-1, "3.3V CAN Transceiver with Sleep Mode, 6 mA, -40 to 125 degC, 8-pin SOIC (D), Green (RoHS & no Sb/Br)"
ConScreen: "FH12 Series, \"Flip-Lock\" SMT/ZIF FFC/FPC Connector - 0.5mm Spaced Top Contact"
L1 L2: "SMT Power Choke Coil; Size 7.3×6.6×3.0mm, ±20% Tolerance, 3.3uH, 6A"
L3: library part CMP-0007-00013-1, "Semi-shielded Power Inductor, 22 uH, +/- 20%, 0.6 A, -40 to 125 degC, 3 x 3 x 1.5 mm SMD, RoHS and Halogen Free, Tape and Reel"
LED&BUZZ: library part "Header 7X2", "Header, 7-Pin, Dual row"
LeftContact: "Header, 15-Pin, Dual row"
PMOS1 PMOS2: library part PMOS
sC: "FT800 Single Chip Embedded Graphic Controller (Embedded Video Engine), -40 to +85 degC, 48-pin VQFN, Pb-Free, Tape and Reel"
uC: library part CMP-0092-00218-1, "32-bit AVR UC3 C Series Microcontroller, 512KB Flash, 68KB SRAM, 45 GPIO pins, Industrial Grade, 64- Pin TQFP, Tray"

## Via types
v1: diameter 0.9, hole 0.5, Top Layer to Bottom Layer, 127 vias
v2: diameter 0.5, hole 0.2, Top Layer to Bottom Layer, 36 vias
v3: diameter 0.9, hole 0.4, Top Layer to Bottom Layer, 13 vias
v4: diameter 0.7, hole 0.3, Top Layer to Bottom Layer, 7 vias
v5: diameter 3.5, hole 3.2, Top Layer to Bottom Layer, 4 vias
v6: diameter 0.6, hole 0.3, Top Layer to Bottom Layer, 3 vias
v7: diameter 1.5, hole 0.9, Top Layer to Bottom Layer, 2 vias
v8: diameter 0.8, hole 0.4, Top Layer to Bottom Layer, 1 vias

## Nets (pads, with @x,y where several pads share a name; then routed paths per layer and width w, separated by ;. In a path a pad name is that pad's centre, name@x,y a point inside that pad or via, vN(x,y) a via of type N, cw(c..) or ccw(c..) an arc to the next point about the centre after c; other vN are vias at no path point)
12V: D1.1 PWR&CAN.2 | length 12.1
  Top Layer w0.6: PWR&CAN.2@-97.282,-8.001 -94.107,-4.826 D1.1@-87.076,-4.826 D1.1@-87.457,-4.445
12V_DIODE: 12Vreg.2 12Vreg.3 12Vreg.4 12Vreg.8 19.5Vreg.5 19.5Vreg.6 C2.2 C6.2 C14.2 L3.1 LED&BUZZ.10 LED&BUZZ.12 LED&BUZZ.14 R2.1 | length 181.2
  Top Layer w0.3: C14.2@-56.273,-15.494 C14.2@-56.048,-15.269
  Top Layer w0.4: 19.5Vreg.5@-3.395,-12.065 19.5Vreg.6@-3.395,-11.415
  Top Layer w0.5: C14.2@-56.048,-15.269 12Vreg.8@-56.048,-13.151
  Top Layer w0.6: LED&BUZZ.10@-100.203,-45.847 -100.203,-40.767 LED&BUZZ.14@-100.33,-40.64 -103.824,-37.146 -103.824,-8.32 -98.249,-2.745 -61.771,-2.745 ; C6.2@-68.199,-11.926 -68.164,-11.891 R2.1@-65.659,-11.891 -60.198,-11.891 ; 12Vreg.2@-58.998,-10.876 12Vreg.3@-58.998,-11.501 12Vreg.4@-58.998,-12.151 -59.258,-11.891 -60.198,-11.891 ; C14.2@-56.273,-15.494 -56.273,-16.395 -57.15,-17.272 -58.674,-17.272 -60.198,-15.748 -60.198,-11.891 ; 19.5Vreg.6@-3.395,-11.415 -3.395,-6.808 -3.46,-6.743 C2.2@-6.539,-6.743 -10.537,-2.745 -61.771,-2.745 ; -61.771,-2.745 -60.198,-4.318 -60.198,-11.891
19.5V: C17.1 ConScreen.40 D3.2 R10.2 | length 49.5
  Top Layer w0.6: v7@-36.195,-27.686 -5.927,-27.686 C17.1@-1.913,-23.672 -1.063,-22.822 R10.2@-1.063,-16.637 -1.143,-16.557 D3.2@-1.143,-13.791
  Bottom Layer w0.6: ConScreen.40@-37.713,-24.707 -37.846,-24.84 -37.846,-26.162 v7(-36.576,-27.432)
ACK_IN: CA2.4 D8.6 LeftContact.8 R44.2 uC.50 | length 113.8
  Top Layer w0.3: uC.50@-66.281,-26.987 -66.281,-26.165 -65.978,-25.862 -56.671,-25.862 -51.456,-31.077 -34.383,-31.077 -33.494,-31.966 -11.341,-31.966 -5.207,-38.1 -5.207,-42.607 R44.2@-12.192,-49.592 -14.105,-51.505 -14.105,-51.642 -21.887,-59.424 -21.887,-62.051 -22.987,-63.151 LeftContact.8@-22.987,-64.135
  Bottom Layer w0.3: CA2.4@-27.207,-66.933 -25.785,-66.933 LeftContact.8@-22.987,-64.135 -24.427,-62.695 -24.427,-60.938 -25.929,-59.436 D8.6@-25.929,-57.404
AMS: LED&BUZZ.2 PMOS2.1 R58.2 | length 12.4
  Top Layer w0.3: LED&BUZZ.2@-100.838,-55.88 -100.838,-60.821 -101.485,-61.468 -101.485,-64.957 PMOS2.1@-101.026,-65.416 -100.826,-65.616 R58.2@-100.826,-67.691
AMS_LED: LED&BUZZ.4 R56.1 | length 8.9
  Top Layer w0.4: LED&BUZZ.4@-100.33,-53.34 -99.06,-54.61 -99.06,-60.972 R56.1@-98.564,-61.468
B0: ConScreen.23 R61.1 R64.2 sC.35 | length 23.4
  Top Layer w0.3: sC.35@-28.992,-17.817 -28.992,-18.295 v1(-27.305,-19.982)
  Bottom Layer w0.3: R64.2@-29.464,-39.624 -29.464,-38.103 R61.1@-29.467,-38.1 -29.467,-32.515 -29.063,-32.111 ConScreen.23@-29.063,-24.707 -29.063,-23.137 -27.343,-21.417 -27.343,-20.02 v1(-27.305,-19.982)
B1: ConScreen.24 R64.1 R67.1 sC.34 | length 25.9
  Top Layer w0.3: sC.34@-29.492,-17.817 -29.492,-18.811 -28.194,-20.109 v1(-28.194,-20.998) v1@-28.194,-21.125
  Bottom Layer w0.3: R67.1@-29.467,-41.402 -30.864,-40.005 R64.1@-30.864,-39.624 -30.864,-32.797 -29.563,-31.496 ConScreen.24@-29.563,-24.707 -29.563,-22.93 -28.194,-21.561 v1(-28.194,-20.998)
B2: ConScreen.25 sC.33 | length 7.6
  Top Layer w0.3: sC.33@-29.992,-17.817 -29.992,-19.073 -29.21,-19.855 v1(-29.21,-20.363)
  Bottom Layer w0.3: ConScreen.25@-30.063,-24.707 -30.063,-22.723 -29.21,-21.87 v1(-29.21,-20.363)
B3: ConScreen.26 sC.32 | length 7.1
  Top Layer w0.3: sC.32@-30.492,-17.817 -30.492,-19.347 -30.315,-19.524 -30.315,-20.833 v1(-30.353,-20.871)
  Bottom Layer w0.3: ConScreen.26@-30.563,-24.707 -30.563,-21.081 v1(-30.353,-20.871)
B4: ConScreen.27 sC.31 | length 6.9
  Top Layer w0.3: v1@-31.242,-19.728 -30.992,-19.478 sC.31@-30.992,-17.817
  Bottom Layer w0.25: v1(-31.115,-19.855) -31.128,-19.868 -31.128,-21.192 -31.063,-21.257 ConScreen.27@-31.063,-24.707
B5: ConScreen.28 sC.30 | length 7.5
  Top Layer w0.3: v1(-32.258,-20.363) -32.258,-19.855 -31.492,-19.089 sC.30@-31.492,-17.817
  Bottom Layer w0.3: v1(-32.258,-20.363) -32.258,-21.379 -31.563,-22.074 ConScreen.28@-31.563,-24.707
BUZZ: LED&BUZZ.13 R12.1 | length 7
  Top Layer w0.3: LED&BUZZ.13@-98.171,-40.767 R12.1@-98.171,-33.72
BUZZ_ON: NMOS1.1 R13.1 uC.7 | length 17.4
  Top Layer w0.3: NMOS1.1@-91.81,-33.335 -90.104,-33.335 -89.727,-32.958 R13.1@-87.884,-32.958 -85.79,-32.958 -84.594,-31.762 uC.7@-75.056,-31.762
CAN_RX1: Can1.4 Opto1.3 | length 14.3
  Top Layer w0.3: Can1.4@-96.356,-25.781 Can1.4@-96.647,-26.072 -96.647,-25.146 -91.821,-20.32 Opto1.3@-85.661,-20.32
CAN_RX1_OPTO: Opto1.6 uC.62 | length 13.5
  Top Layer w0.3: Opto1.6@-80.201,-20.32 -74.096,-20.32 -72.281,-22.135 uC.62@-72.281,-26.987
CAN_RX2: Can2.4 Opto2.3 | length 11.7
  Top Layer w0.3: Can2.4@-83.783,-8.255 -75.946,-8.255 -74.676,-9.525 Opto2.3@-74.676,-11.621
CAN_RX2_OPTO: Opto2.6 uC.58 | length 15.7
  Top Layer w0.3: Opto2.6@-74.676,-17.081 -74.676,-16.51 -73.914,-15.748 -71.755,-15.748 -70.281,-17.222 uC.58@-70.281,-26.987
CAN_TX1: Can1.1 Opto1.2 | length 18.3
  Top Layer w0.3: Can1.1@-100.457,-26.072 -100.457,-25.019 -99.568,-24.13 -96.774,-24.13 -91.694,-19.05 Opto1.2@-85.661,-19.05
CAN_TX1_OPTO: Opto1.7 uC.63 | length 17.7
  Top Layer w0.3: Opto1.7@-80.201,-19.05 -80.899,-19.05 -81.407,-19.558 -81.311,-19.654 -81.311,-22.067 -80.899,-22.479 -77.089,-22.479 -76.581,-21.971 -73.152,-21.971 -72.781,-22.342 uC.63@-72.781,-26.987
CAN_TX2: Can2.1 Opto2.2 | length 12.1
  Top Layer w0.3: Can2.1@-83.783,-12.065 -82.64,-13.208 -74.041,-13.208 -73.406,-12.573 Opto2.2@-73.406,-11.621
CAN_TX2_OPTO: Opto2.7 uC.59 | length 11
  Top Layer w0.3: Opto2.7@-73.406,-17.081 -73.406,-20.193 -70.781,-22.818 uC.59@-70.781,-26.987
DISP_ON: ConScreen.31 sC.28 | length 9.1
  Top Layer w0.3: v1(-34.671,-20.109) -34.671,-19.728 -34.528,-19.585 -33.449,-19.585 -32.492,-18.628 sC.28@-32.492,-17.817
  Bottom Layer w0.3: v1(-34.671,-20.109) -34.671,-21.379 -33.063,-22.987 ConScreen.31@-33.063,-24.707
G0: ConScreen.15 R60.2 R63.2 sC.42 | length 30.9
  Top Layer w0.3: sC.42@-27.692,-14.517 -25.531,-14.517 v1(-23.241,-16.807)
  Bottom Layer w0.3: R63.2@-23.495,-39.751 -23.495,-38.351 R60.2@-23.371,-38.227 -25.063,-36.535 ConScreen.15@-25.063,-24.707 -25.063,-23.605 -22.098,-20.64 -22.098,-17.696 v1@-23.114,-16.68
G1: ConScreen.16 R63.1 R66.2 sC.41 | length 30.9
  Top Layer w0.3: sC.41@-27.692,-15.017 -26.555,-15.017 v1(-23.241,-18.331)
  Bottom Layer w0.3: R66.2@-23.498,-41.529 -24.895,-40.132 R63.1@-24.895,-39.751 -25.563,-39.083 ConScreen.16@-25.563,-24.707 -25.563,-23.398 -23.203,-21.038 -23.203,-18.718 -23.241,-18.68 v1(-23.241,-18.331)
G2: ConScreen.17 sC.40 | length 11.7
  Top Layer w0.3: sC.40@-27.692,-15.517 -26.881,-15.517 -24.041,-18.357 -24.041,-19.436 v1(-24.003,-19.474)
  Bottom Layer w0.3: ConScreen.17@-26.063,-24.707 -26.063,-23.191 -24.13,-21.258 v1@-24.13,-19.728
G3: ConScreen.18 sC.39 | length 10.6
  Top Layer w0.3: sC.39@-27.692,-16.017 -27.088,-16.017 -25.019,-18.086 v1(-25.019,-18.585)
  Bottom Layer w0.3: ConScreen.18@-26.563,-24.707 -26.563,-22.983 -24.892,-21.312 v1@-24.892,-18.839
G4: ConScreen.19 sC.38 | length 9.8
  Top Layer w0.3: sC.38@-27.692,-16.517 -27.295,-16.517 -26.289,-17.523 v1(-26.289,-18.331)
  Bottom Layer w0.3: ConScreen.19@-27.063,-24.707 -27.063,-22.776 -25.743,-21.456 -25.743,-19.182 -26.289,-18.636 v1(-26.289,-18.331)
G5: ConScreen.20 sC.37 | length 8.6
  Top Layer w0.3: sC.37@-27.692,-17.017 -27.692,-18.452 -27.305,-18.839 -27.305,-18.851 -26.505,-19.651 -26.505,-20.738 -26.543,-20.776 v1(-26.543,-21.125)
  Bottom Layer w0.3: ConScreen.20@-27.563,-24.707 -27.563,-22.344 -26.543,-21.324 v1(-26.543,-21.125)
GND: 12Vreg.1 12Vreg.5 12Vreg.6 12Vreg.7 12Vreg.9 12Vreg.11 12Vreg.12 12Vreg.16 12Vreg.17 19.5Vreg.2 19.5Vreg.3 C1.2 C2.1 C3.2 C4.2 C5.1 C6.1 C7.1 C8.1 C9.2 C10.1 C11.1 C12.1 C13.1 C14.1 C15.1 C16.1 C17.2 C18.1 C19.1 C20.1 C21.1 C22.1 C23.1 C24.1 C25.1 C26.1 C27.1 C28.1 C29.2 C30.2 C31.2 C32.1 C33.1 CA1.5 CA1.6 CA1.7 CA1.8 CA2.5 CA2.6 CA2.7 CA2.8 CA3.5 CA3.6 CA3.7 CA3.8 CA4.5 CA4.6 CA4.7 CA4.8 CA5.5 CA5.6 CA5.7 CA5.8 CA6.5 CA6.6 CA6.7 CA6.8 CA7.5 CA7.6 CA7.7 CA7.8 Can1.2 Can2.2 ConScreen.1 ConScreen.2 ConScreen.29 ConScreen.39 ConScreen.41 ConScreen.42 D2.A D7.2 D8.2 D9.2 D10.2 D11.2 D12.2 D13.2 D14.2 JTAG1.6 JTAG1.10 LeftContact.4 LeftContact.7 LeftContact.10 LeftContact.22 NMOS1.2 NMOS2.2 NMOS3.2 NMOS4.2 NMOS5.2 NMOS6.2 NMOS7.2 Opto1.4 Opto1.5 Opto2.4 Opto2.5 PMOS1.2 PMOS2.2 PWR&CAN.1 R6.2 R8.2 R9.1 R13.2 R15.2 R17.2 R18.2 R21.2 R22.2 R23.1 R24.1 R25.1 R55.1 R57.2 R58.1 R68.1 R69.2 R70.2 RightContact.2 RightContact.4 RightContact.5 sC.2 sC.10 sC.15 sC.23 sC.36 sC.49 SR1.8 SR1.10 SR1.15 SR2.8 SR2.10 SR2.15 SR3.8 SR3.10 SR3.11 SR3.12 SR3.13 SR3.14 SR3.15 uC.6 uC.17 uC.26 uC.30 uC.36 uC.52 Y1.2 Y1.4 Y2.2 Y2.4 | length 341.9
  Top Layer w0.3: R6.2@-102.3,-17.526 -102.3,-18.604 v1@-101.854,-19.05 ; v1@-99.379,-31.688 C19.1@-99.379,-28.956 -99.187,-28.764 Can1.2@-99.187,-26.072 ; R58.1@-99.326,-67.691 -99.326,-65.616 PMOS2.2@-99.126,-65.416 -97.674,-65.416 -97.663,-65.405 v1(-97.282,-65.405) ; v1(-95.504,-65.786) -96.139,-65.151 R57.2@-96.139,-64.25 -95.188,-64.25 PMOS1.2@-93.737,-62.799 -93.737,-63.235 v1(-92.075,-64.897) ; C9.2@-94.677,-17.526 -94.677,-19.242 v1(-94.615,-19.304) ; v1(-92.583,-27.686) -92.899,-28.002 D14.2@-92.899,-29.21 -91.81,-30.299 NMOS1.2@-91.81,-31.435 -88.007,-31.435 R13.2@-87.884,-31.558 -86.422,-31.558 v1(-86.106,-31.242) ; v1(-92.583,-17.907) -92.456,-17.78 C12.1@-89.092,-17.78 ; v1(-92.202,-15.367) R8.2@-92.202,-13.908 ; C3.2@-92.202,-6.666 -90.235,-6.666 v1(-90.043,-6.858) ; v1(-91.948,-38.989) -90.231,-40.706 NMOS3.2@-88,-40.706 -86.93,-39.636 R17.2@-85.471,-39.636 -84.975,-39.636 v1(-84.201,-38.862) ; v1(-91.44,-47.244) -90.739,-47.945 NMOS5.2@-87.873,-47.945 -84.782,-47.945 R21.2@-84.709,-48.018 -84.34,-48.018 v1(-82.931,-46.609) ; v1@-91.44,-35.306 -91.374,-35.372 NMOS2.2@-87.365,-35.372 -87.038,-35.699 R15.2@-84.963,-35.699 -84.963,-33.655 v1(-84.328,-33.02) ; v1(-88.392,-21.59) Opto1.4@-85.661,-21.59 ; v1(-88.265,-54.356) -87.873,-54.748 NMOS7.2@-87.873,-55.946 -85.29,-55.946 R55.1@-85.09,-56.146 -83.578,-56.146 v1(-83.439,-56.007) ; v1(-86.995,-51.562) -86.741,-51.562 -86.294,-52.009 NMOS6.2@-83.174,-52.009 -83.174,-50.166 R22.2@-81.026,-48.018 ; Can2.2@-83.783,-10.795 -83.718,-10.86 C4.2@-80.772,-10.86 -79.694,-11.938 v1(-79.629,-11.938) ; NMOS4.2@-83.555,-43.119 -83.555,-41.657 R18.2@-83.046,-41.148 -82.296,-40.398 v8(-82.296,-38.735) ; Opto1.5@-80.201,-21.59 -78.359,-21.59 v1(-78.232,-21.463) ; v1(-80.137,-15.748) -79.567,-16.318 C13.1@-78.105,-16.318 ; v1(-78.232,-49.911) R23.1@-78.232,-48.452 ; v1@-77.343,-10.224 Opto2.4@-75.946,-11.621 ; v4(-77.089,-30.988) -76.815,-31.262 uC.6@-75.056,-31.262 ; v1(-76.835,-41.021) -76.2,-40.386 C29.2@-75.122,-40.386 -75.122,-38.927 -74.232,-38.037 uC.17@-73.281,-38.037 ; v1(-76.708,-24.003) -75.946,-24.765 C20.1@-75.249,-24.765 ; v1(-76.454,-49.911) R24.1@-76.454,-48.452 ; v1(-76.327,-6.477) -75.435,-7.369 D2.A@-73.787,-7.369 -71.043,-7.369 C1.2@-70.993,-7.319 -69.041,-7.319 v1(-68.199,-6.477) ; v1(-75.946,-18.796) Opto2.5@-75.946,-17.081 ; v1(-74.549,-49.911) R25.1@-74.549,-48.452 ; v4@-72.517,-19.558 -71.563,-20.512 C18.1@-71.374,-20.512 ; RightContact.4@-71.501,-64.008 RightContact.2@-68.961,-64.008 ; v1(-71.501,-43.434) -70.677,-42.61 C31.2@-70.677,-42.037 C30.2@-70.677,-40.259 -69.58,-39.162 -69.084,-39.162 -68.806,-38.884 -68.806,-38.062 uC.26@-68.781,-38.037 ; v1(-71.12,-46.228) -70.169,-45.277 C33.1@-69.469,-45.277 -67.895,-45.277 Y2.2@-67.394,-44.776 -67.394,-44.788 v1(-69.596,-46.99) ; C5.1@-70.674,-9.652 -70.674,-13.019 v1(-70.104,-13.589) v3(-67.818,-13.589) ; v7(-68.58,-31.623) -67.281,-30.324 uC.52@-67.281,-26.987 -67.281,-24.863 -65.848,-23.43 C21.1@-64.77,-23.43 -64.593,-23.253 C22.1@-62.738,-23.253 ; C6.1@-68.199,-10.426 -68.199,-8.89 v1(-68.072,-8.763) ; uC.30@-66.781,-38.037 -66.781,-37.19 -66.294,-36.703 -65.278,-36.703 -63.373,-38.608 v1(-62.611,-38.608) -65.079,-41.076 Y2.4@-65.194,-41.076 ; v3@-64.262,-16.764 v3(-64.135,-16.637) -62.865,-15.367 v3(-62.865,-14.605) ; uC.36@-64.006,-34.762 -62.762,-34.762 -62.561,-34.963 v4(-60.922,-34.963) ; C32.1@-63.373,-43.369 -63.373,-41.021 v1(-62.611,-40.259) ; 12Vreg.1@-58.998,-10.201 12Vreg.17@-57.998,-10.201 ; 12Vreg.17@-57.998,-12.151 -57.348,-11.501 12Vreg.6@-57.348,-13.151 ; 12Vreg.16@-57.998,-9.201 12Vreg.17@-57.998,-10.201 ; C14.1@-57.9,-15.621 -57.9,-13.249 12Vreg.5@-57.998,-13.151 12Vreg.6@-57.348,-13.151 ; v1(-57.531,-44.704) -57.531,-44.51 SR1.8@-56.19,-43.169 ; 12Vreg.17@-56.023,-10.201 -56.048,-10.201 12Vreg.17@-56.698,-10.851 ; 12Vreg.9@-55.048,-12.151 -56.048,-12.151 12Vreg.17@-56.698,-11.501 ; 12Vreg.12@-55.048,-10.201 12Vreg.11@-55.048,-10.851 12Vreg.17@-56.698,-10.851 ; SR1.10@-50.49,-42.519 -50.615,-42.394 -51.382,-42.394 -51.816,-41.96 -51.816,-39.828 -51.382,-39.394 -50.615,-39.394 SR1.15@-50.49,-39.269 -50.402,-39.181 C23.1@-48.006,-39.181 C24.1@-46.228,-39.181 -44.896,-39.181 v1(-44.704,-38.989) ; C7.1@-41.848,-9.695 -42.588,-9.695 -43.688,-10.795 -43.688,-14.55 Y1.4@-42.629,-15.609 ; Y1.2@-40.429,-11.909 -42.629,-14.109 Y1.4@-42.629,-15.609 ; C8.1@-38.038,-9.568 -38.038,-9.968 v4(-37.211,-10.795) ; C10.1@-37.465,-15.271 -37.465,-17.018 -37.846,-17.399 ; v1(-36.632,-43.886) SR2.8@-36.632,-42.407 ; sC.15@-34.792,-12.517 sC.49@-32.992,-12.517 ; sC.10@-32.992,-10.717 sC.49@-32.992,-12.517 ; SR2.10@-30.932,-41.757 -30.165,-41.757 -29.732,-42.19 -29.732,-43.575 v1(-30.48,-44.323) ; SR2.15@-30.932,-38.507 -28.79,-38.507 C25.1@-28.575,-38.292 C26.1@-26.797,-38.292 -26.797,-39.878 v1(-26.67,-40.005) ; sC.2@-28.992,-10.717 -28.992,-12.017 v2(-29.042,-12.067) v2(-30.142,-13.167) v2(-31.242,-14.267) ; sC.36@-28.492,-17.817 -28.492,-17.017 v2(-29.042,-16.467) v2(-30.142,-15.367) v2(-31.242,-14.267) ; v1(-24.511,-67.691) -25.527,-66.675 LeftContact.10@-25.527,-64.135 LeftContact.7@-22.987,-61.595 -22.987,-59.055 v4(-23.114,-58.928) ; LeftContact.4@-17.907,-64.135 -15.621,-66.421 v1(-15.621,-68.072) ; v1(-16.439,-44.267) SR3.8@-16.439,-42.915 ; SR3.15@-10.739,-39.015 SR3.14@-10.739,-39.665 ; v1(-8.229,-42.265) SR3.10@-10.739,-42.265 SR3.11@-10.739,-41.615 SR3.12@-10.739,-40.965 SR3.13@-10.739,-40.315 SR3.14@-10.739,-39.665 ; v1(-6.477,-41.529) -6.604,-41.402 C28.1@-6.604,-39.689 C27.1@-8.509,-39.689 -10.715,-39.689 SR3.14@-10.739,-39.665 ; 12Vreg.17@-57.998,-10.201 v2(-57.023,-11.176) ; 12Vreg.6@-57.348,-13.151 12Vreg.7@-56.698,-13.151 12Vreg.17@-56.698,-11.501 ; v2(-57.023,-11.176) 12Vreg.17@-56.698,-10.851 ; v2(-57.023,-11.176) 12Vreg.17@-56.698,-11.501 ; Y1.4@-42.629,-15.609 -41.848,-16.39 C16.1@-41.848,-17.823 -40.494,-19.177 -39.624,-19.177 -37.846,-17.399 ; -37.846,-17.399 -36.349,-17.399 -35.492,-16.542 -34.817,-16.542 sC.23@-34.792,-16.517 -34.767,-16.492 -34.37,-16.492 -32.145,-14.267 v2(-31.242,-14.267) ; sC.49@-32.992,-12.517 v2(-32.342,-13.167) v2(-31.242,-14.267)
  Top Layer w0.4: v1(-9.779,-8.001) v1@-9.537,-8.243 ; 19.5Vreg.2@-5.495,-12.065 19.5Vreg.3@-5.495,-12.715 -5.495,-14.317 v1(-5.461,-14.351)
  Top Layer w0.5: v1(-11.049,-19.431) C11.1@-11.049,-17.133 ; v1@-9.537,-8.243 C2.1@-6.539,-8.243
  Top Layer w0.6: 12Vreg.9@-55.048,-12.176 -54.436,-12.788 C15.1@-54.436,-15.621 -54.436,-17.225 v1(-54.737,-17.526) ; v3(-11.684,-21.717) -9.729,-23.672 C17.2@-6.513,-23.672 -8.589,-21.596 R9.1@-8.589,-16.764
  Bottom Layer w0.3: LeftContact.22@-40.767,-64.135 -41.529,-64.897 -41.529,-67.172 CA4.8@-40.645,-68.056 ; v3(-37.338,-21.971) -37.063,-22.246 ConScreen.39@-37.063,-24.707 -37.063,-25.502 -36.858,-25.707 -32.268,-25.707 -32.063,-25.502 ConScreen.29@-32.063,-24.707
  other v1: -91.186,-35.306 -99.314,-31.496 -102.108,-19.177 -77.47,-10.033
  other v2: -33.442,-16.467 -32.342,-16.467 -31.242,-16.467 -30.142,-16.467 -33.442,-15.367 -32.342,-15.367 -31.242,-15.367 -29.042,-15.367 -33.442,-14.267 -32.342,-14.267 -30.142,-14.267 -29.042,-14.267 -33.442,-13.167 -31.242,-13.167 -29.042,-13.167 -58.023,-12.176 -57.023,-12.176 -56.023,-12.176 -33.442,-12.067 -32.342,-12.067 -31.242,-12.067 -30.142,-12.067 -58.023,-11.176 -56.023,-11.176 -58.023,-10.176 -57.023,-10.176 -56.023,-10.176
  other v4: -72.644,-19.431
H1CAN: Can1.7 PWR&CAN.5 R7.2 | length 8.4
  Top Layer w0.3: PWR&CAN.5@-99.822,-13.081 -99.822,-17.018 R7.2@-99.314,-17.526 -99.314,-21.045 Can1.7@-99.187,-21.172
H2CAN: Can2.7 PWR&CAN.3 R1.2 | length 12.2
  Top Layer w0.3: PWR&CAN.3@-99.822,-10.541 -99.314,-10.541 -97.917,-11.938 -93.977,-11.938 -93.026,-10.987 R1.2@-92.202,-10.987 -88.875,-10.987 Can2.7@-88.683,-10.795
HSYNC: ConScreen.32 sC.27 | length 10
  Top Layer w0.3: v1(-35.814,-19.982) -35.814,-19.601 -35.298,-19.085 -33.656,-19.085 -32.992,-18.421 sC.27@-32.992,-17.817
  Bottom Layer w0.3: v1(-35.814,-19.982) -35.814,-21.252 -33.563,-23.503 ConScreen.32@-33.563,-24.707
IMD: LED&BUZZ.1 PMOS1.1 R57.1 | length 9.8
  Top Layer w0.3: LED&BUZZ.1@-97.79,-55.88 -97.79,-56.846 PMOS1.1@-93.737,-60.899 ; R57.1@-96.139,-62.75 -95.588,-62.75 PMOS1.1@-93.81,-60.972
IMD_LED: LED&BUZZ.3 R54.2 | length 7.4
  Top Layer w0.3: LED&BUZZ.3@-97.79,-53.34 -96.139,-54.991 -96.139,-55.868 R54.2@-93.206,-58.801